# Altium PCB DriverV3.0.PcbDoc
Units mm, origin at the board's own origin, x right, y up, seen from the top; angles counter-clockwise.
Board outline 52 x 50 mm, 6 copper layers (Top, Signal1, Gnd1, Signal2, Gnd2, Bottom), stack 1.696 mm thick; 74 components, 33 nets, 311 pads, 891 vias.
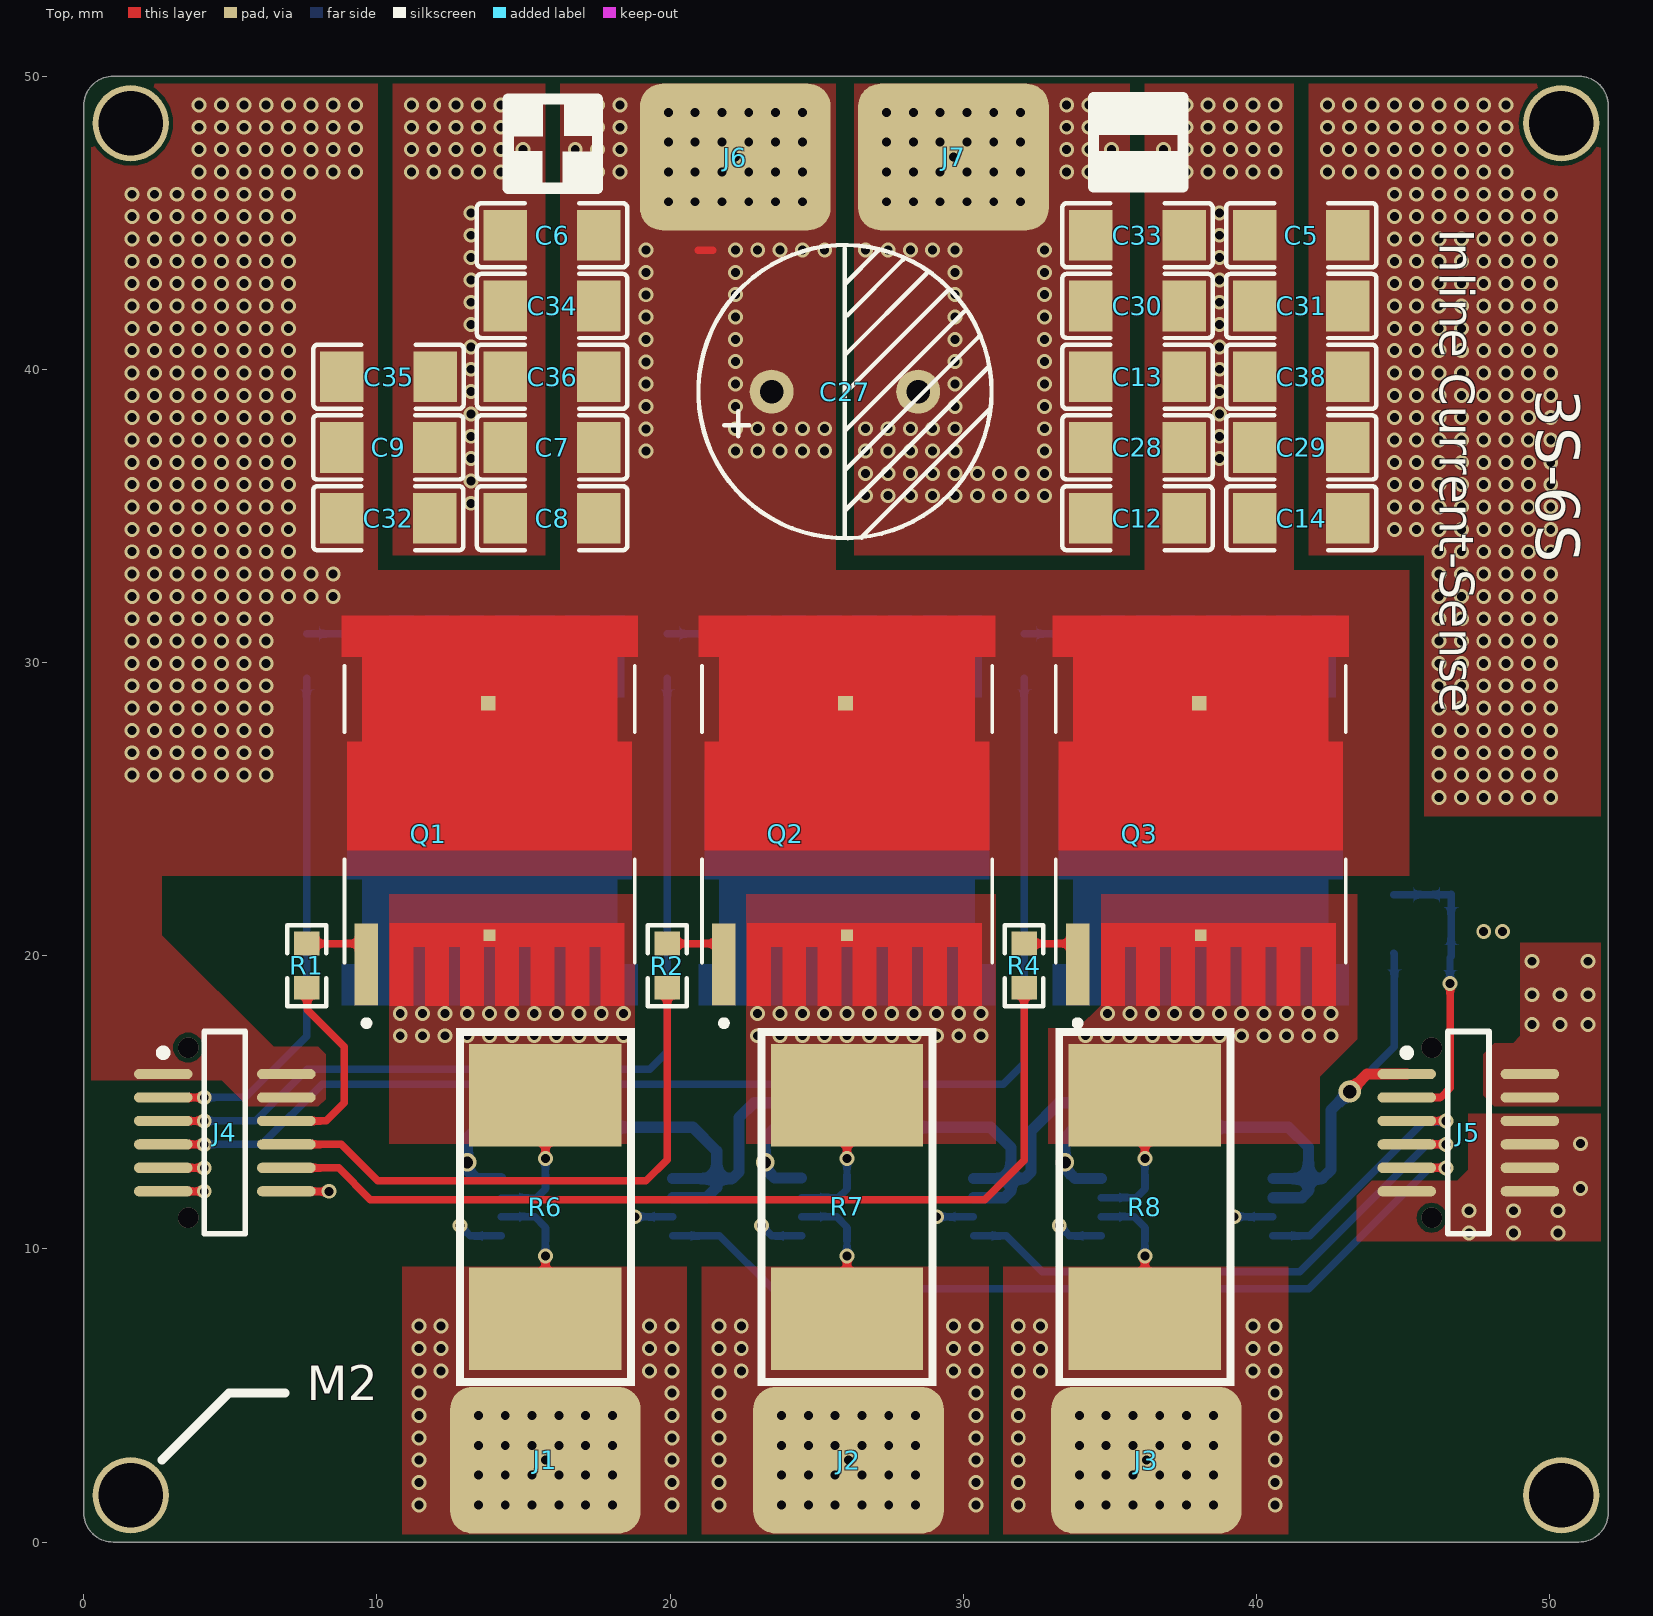
[diagram p0: Top view]
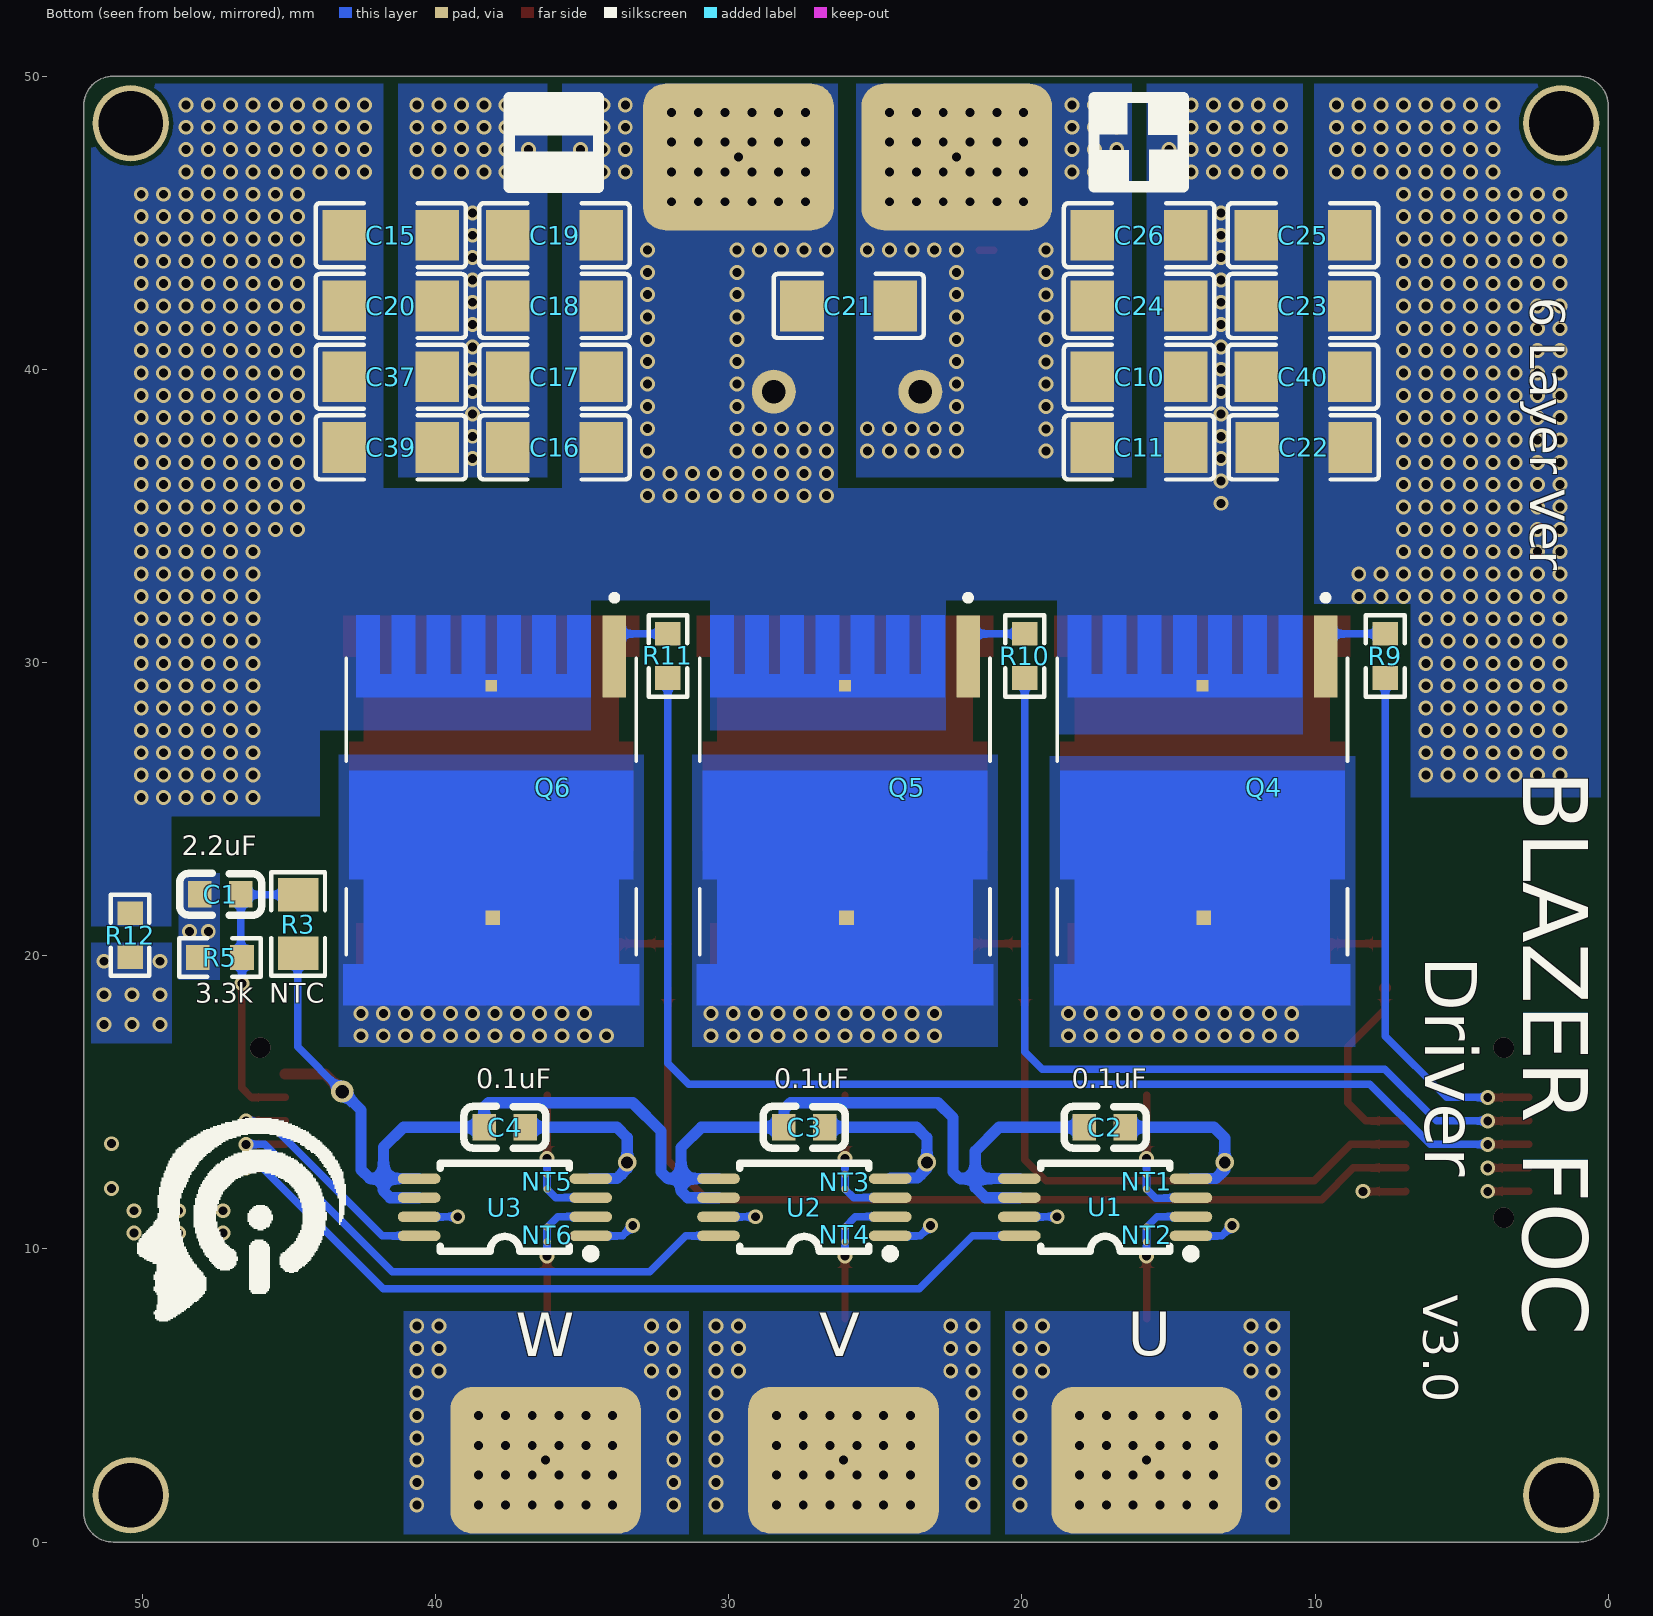
[diagram p1: Bottom view, seen from below]
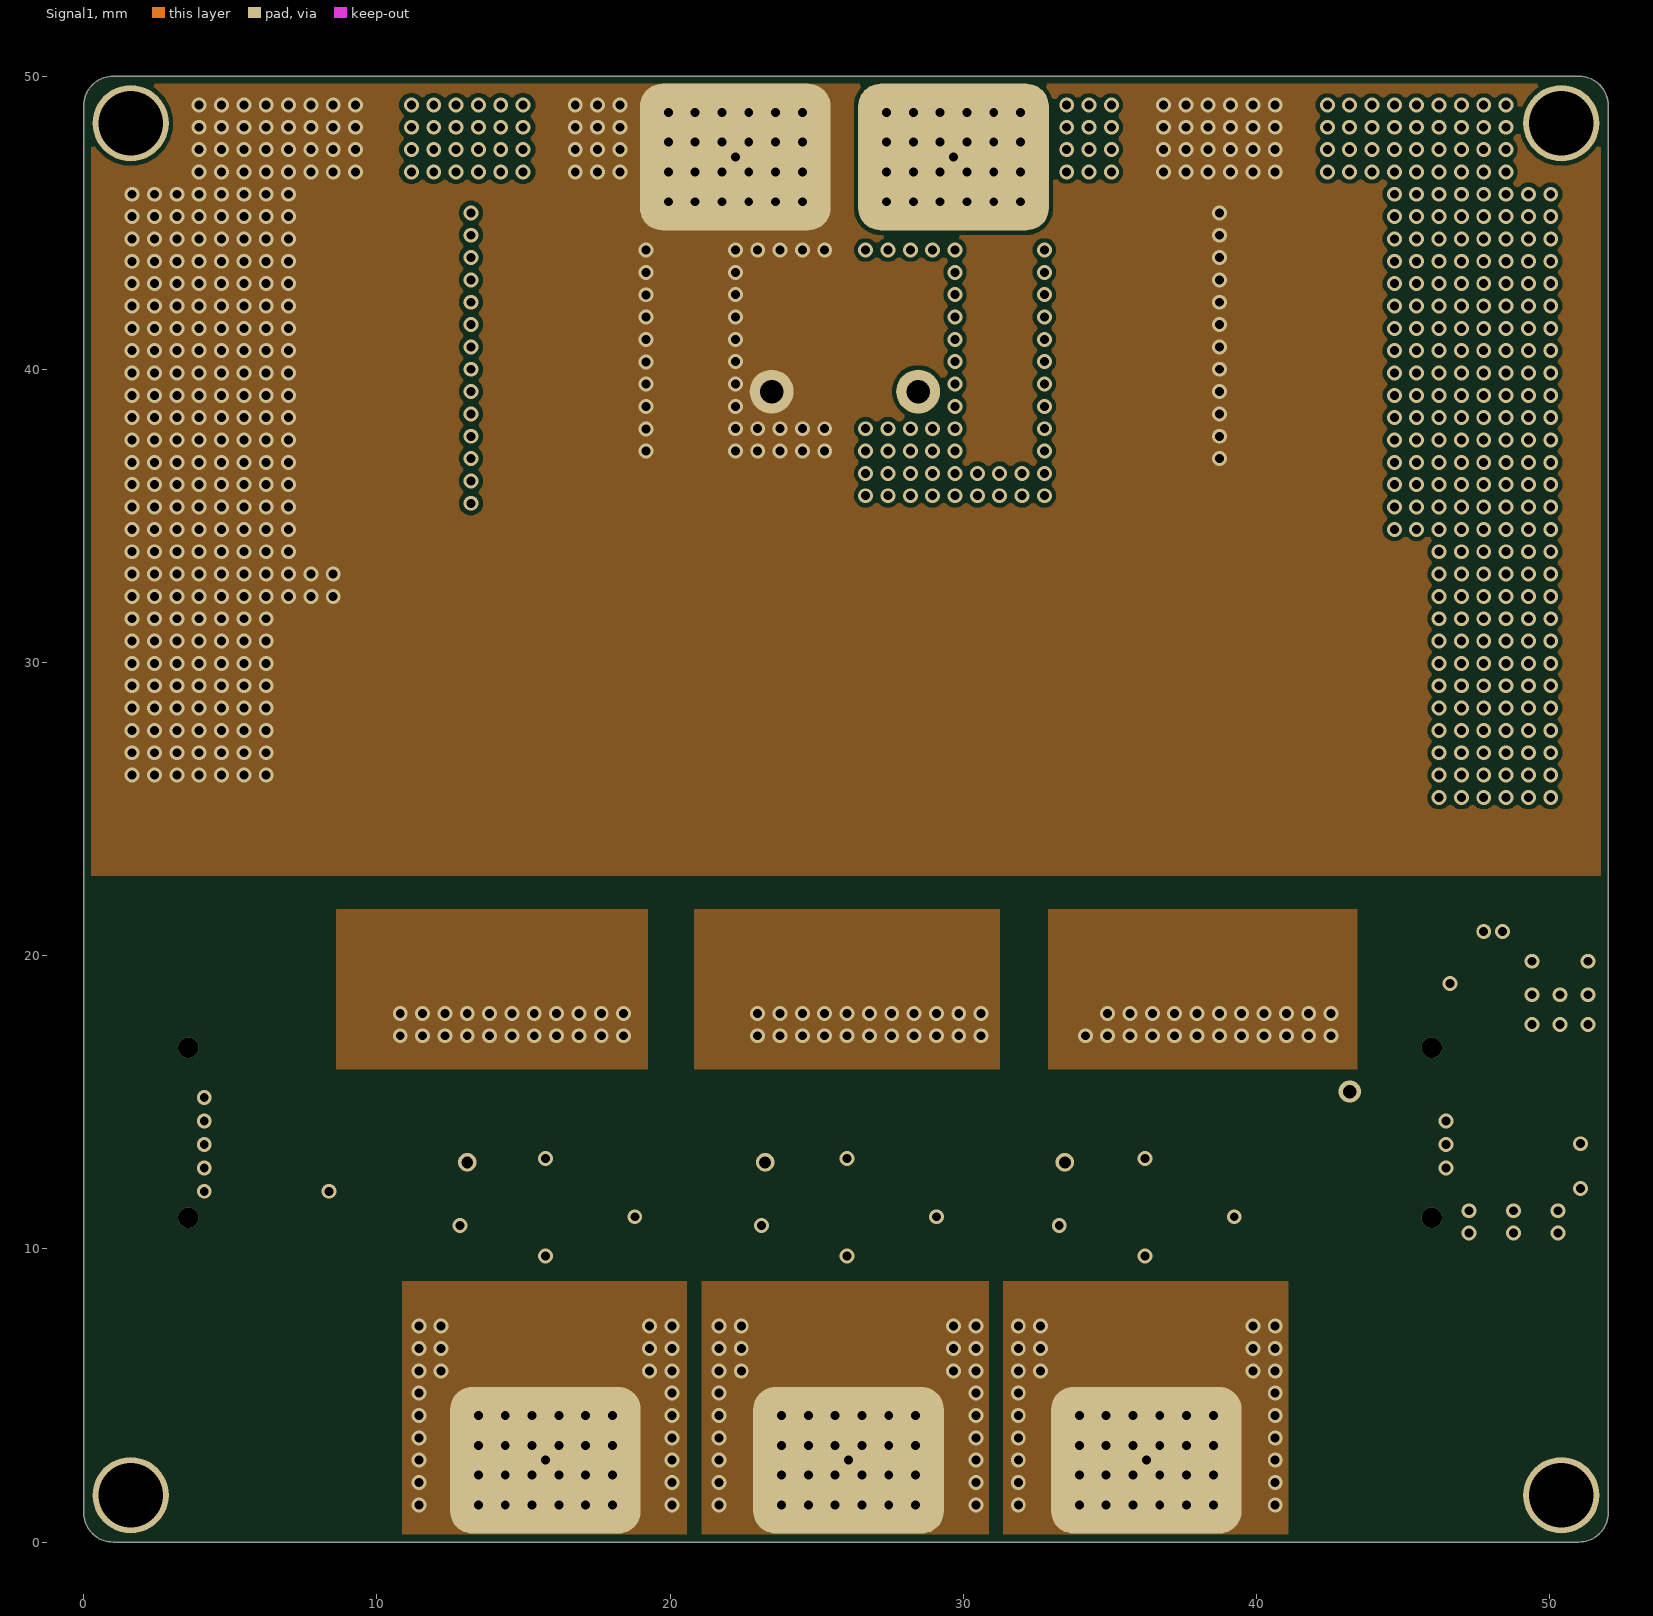
[diagram p2: Signal1]
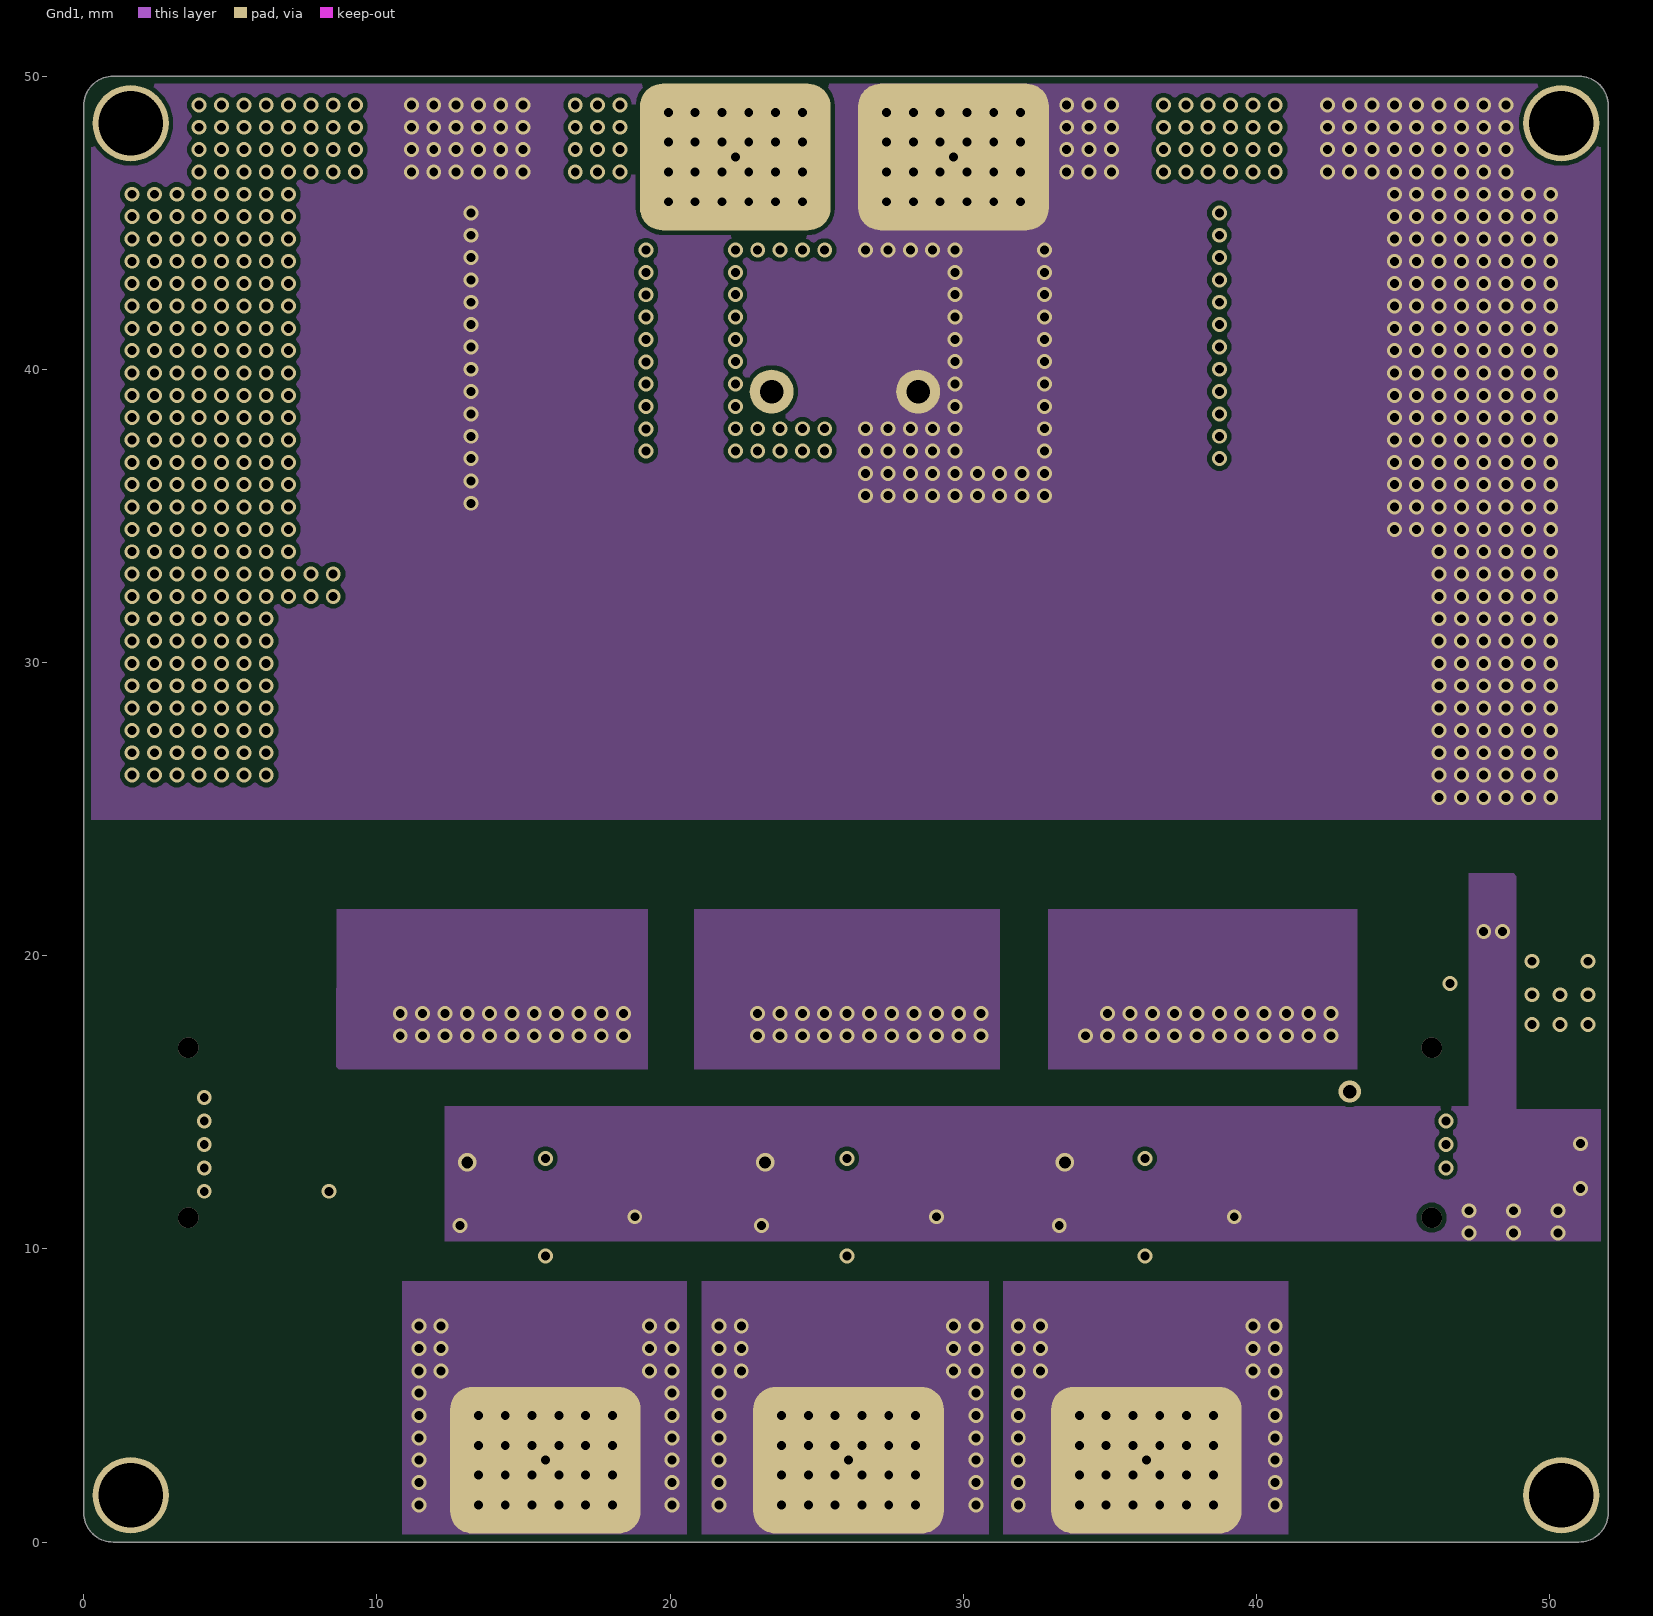
[diagram p3: Gnd1]
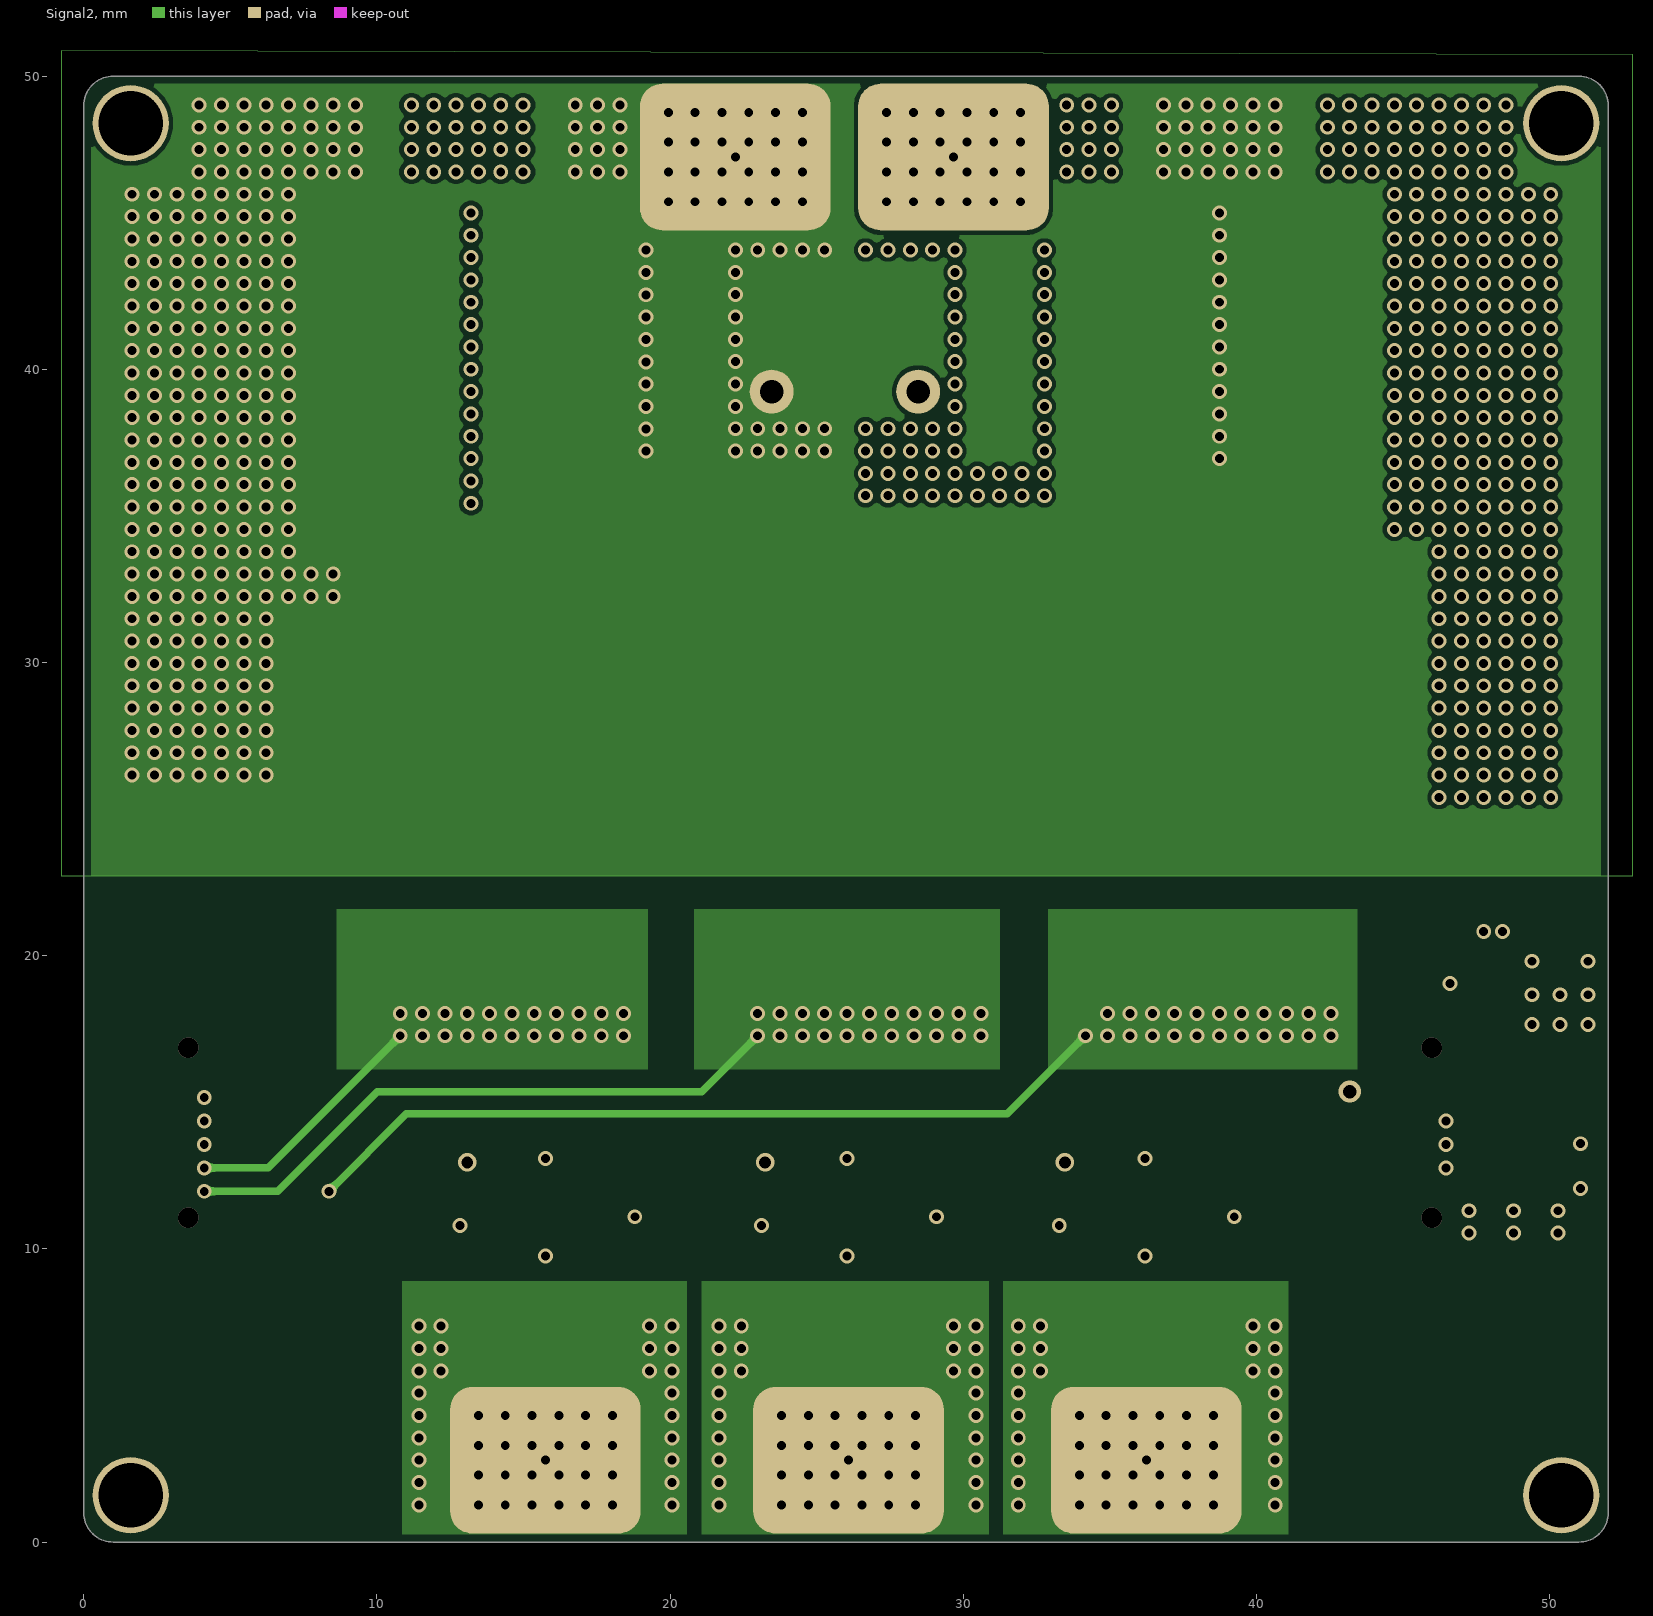
[diagram p4: Signal2]
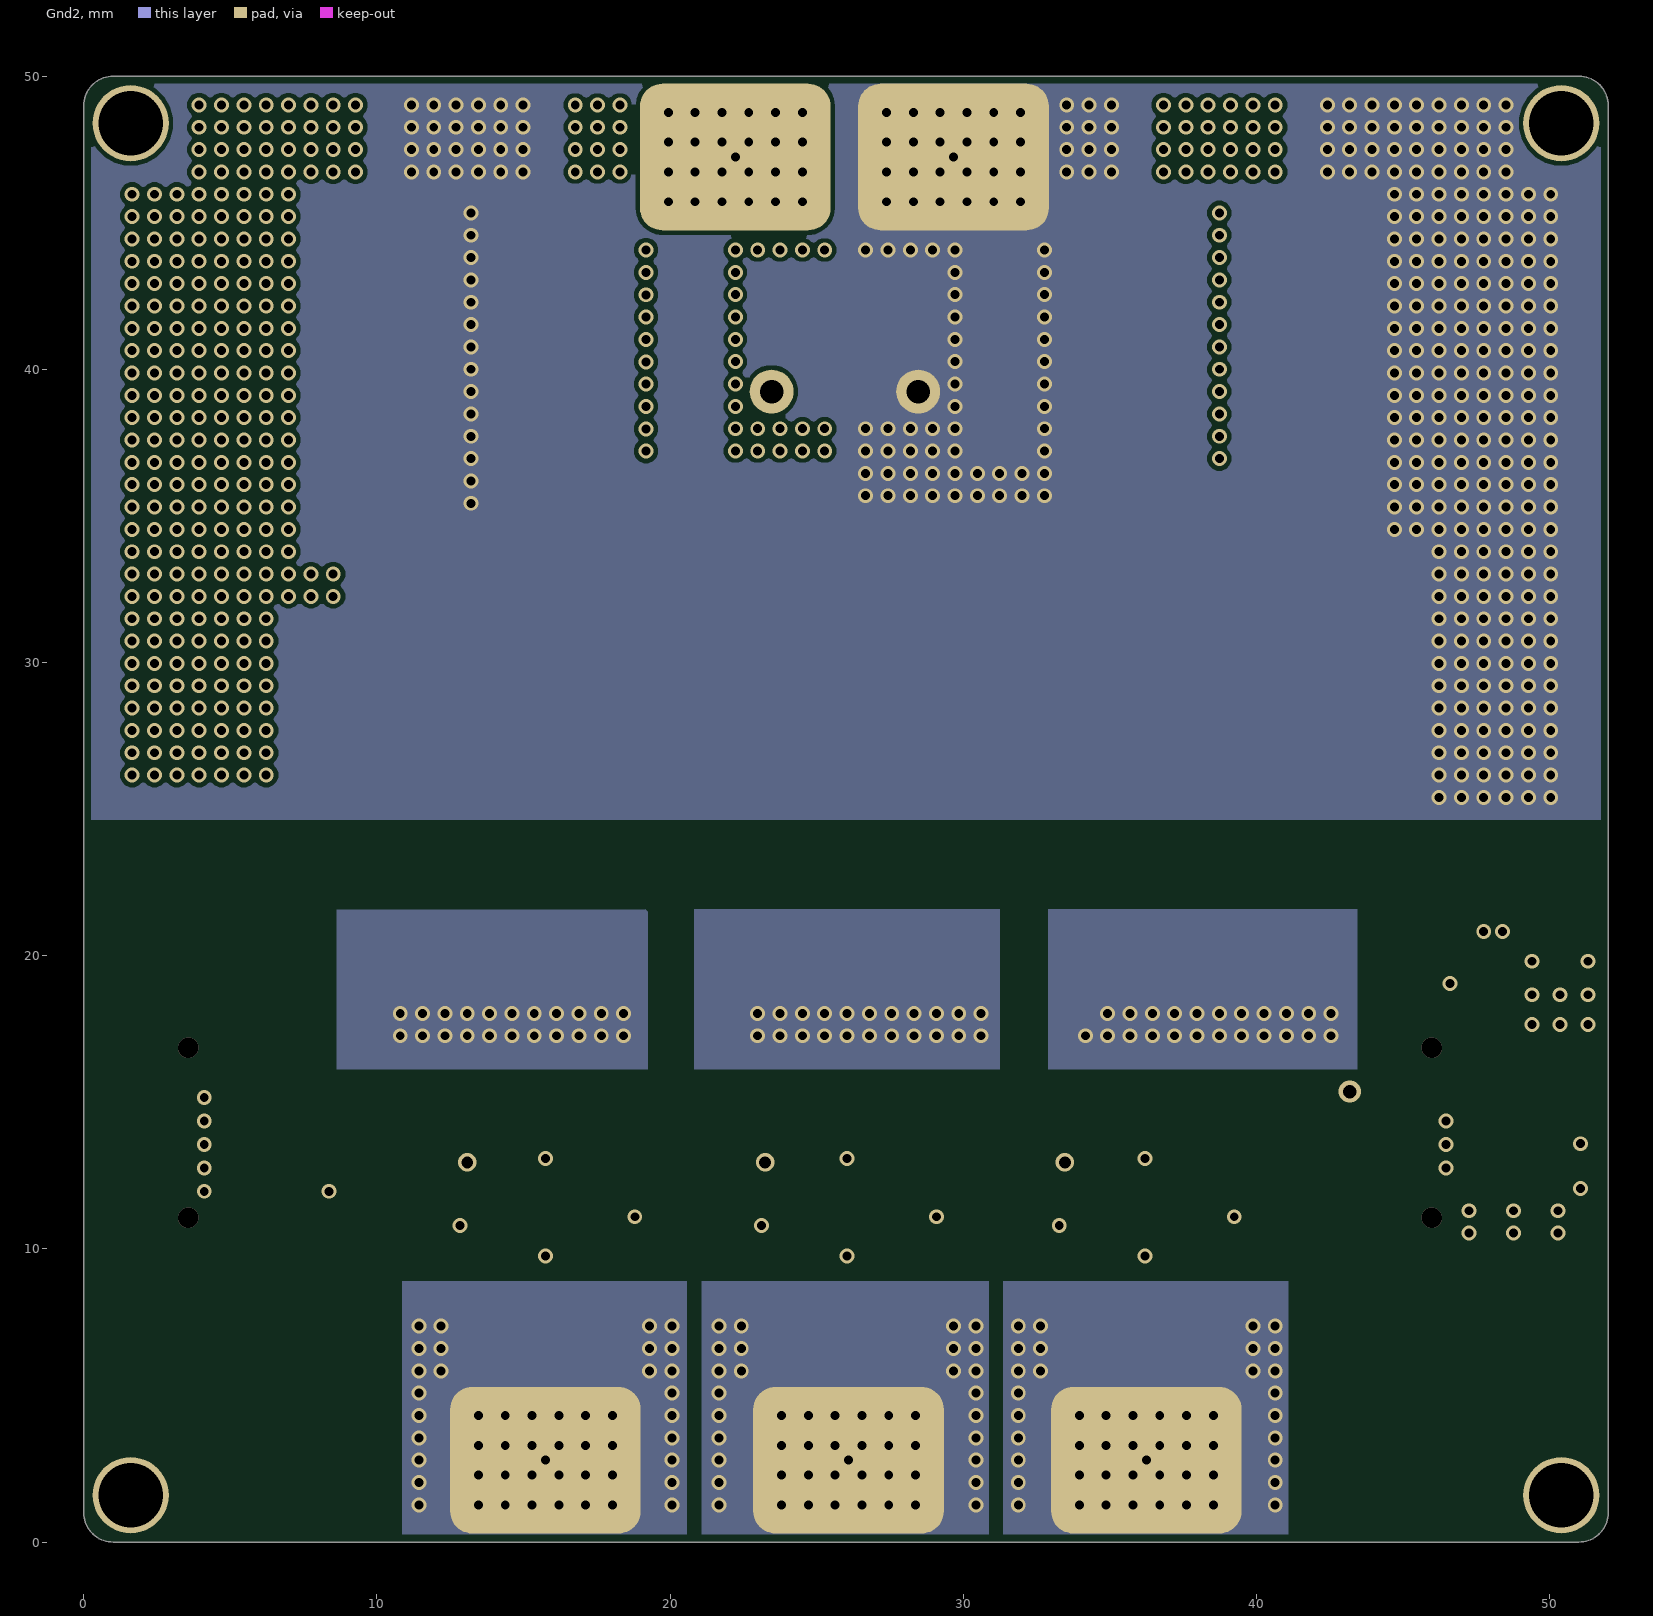
[diagram p5: Gnd2]
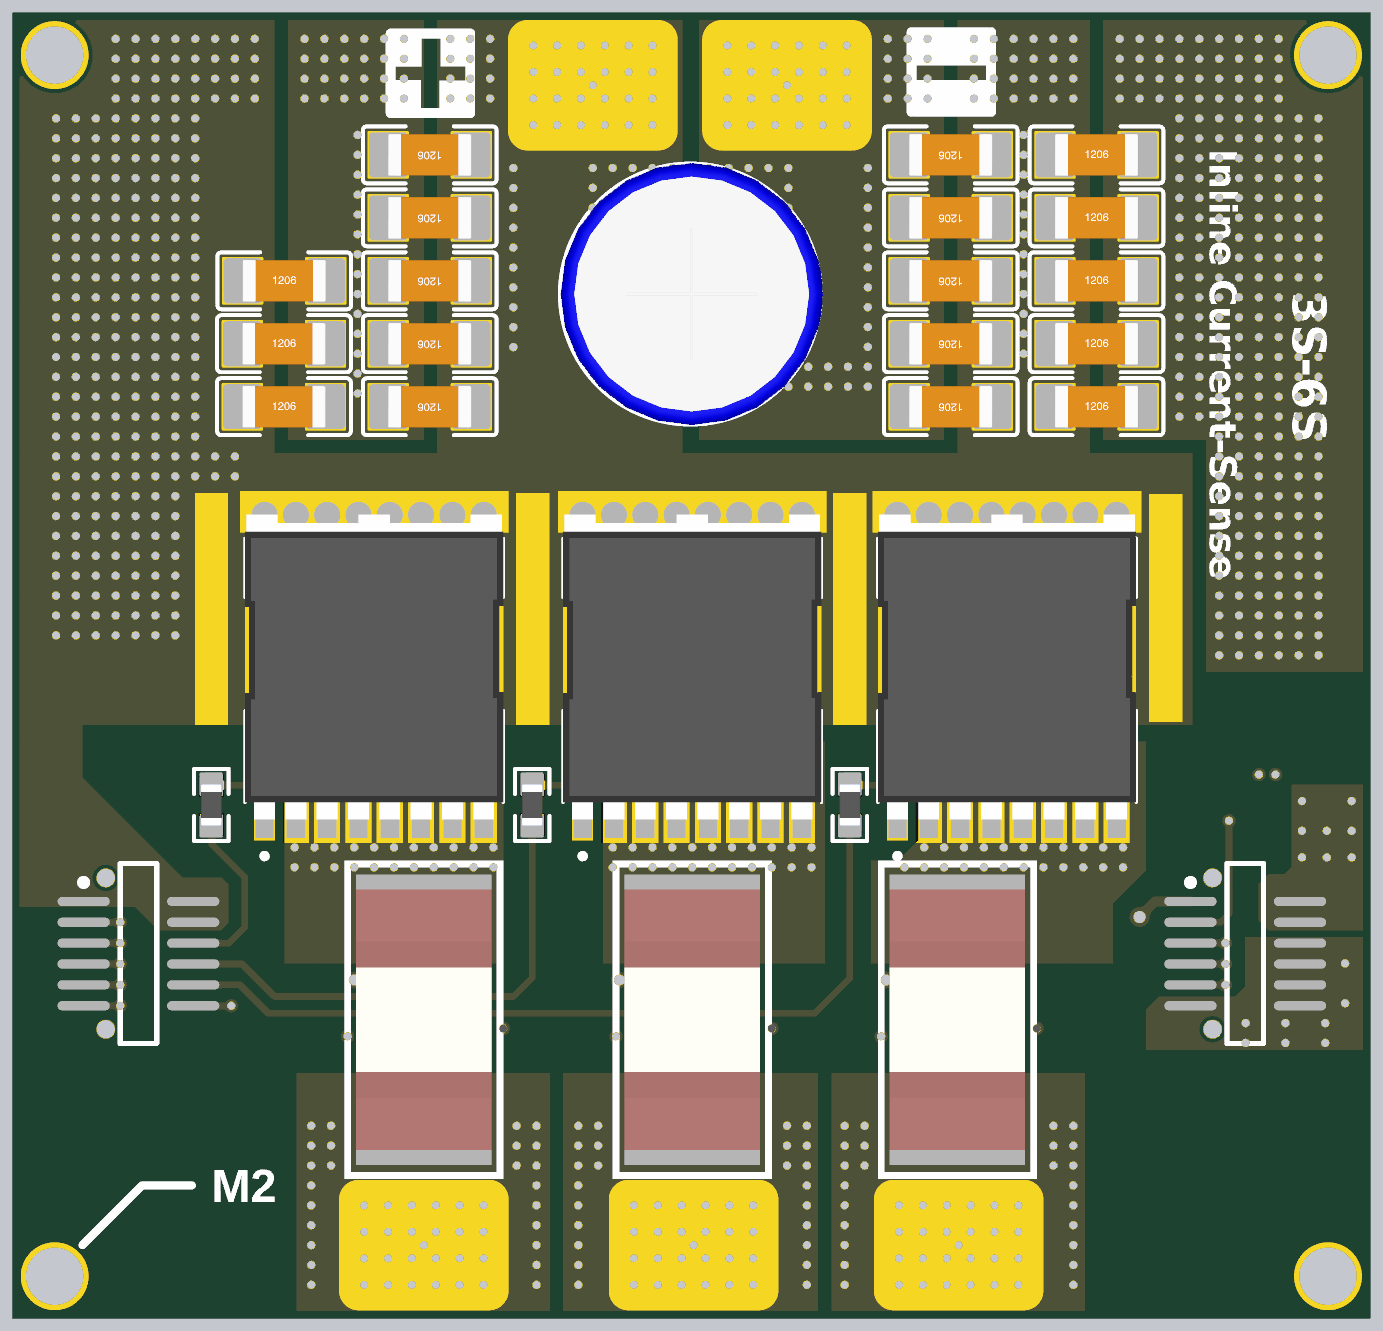
[diagram p6: 3D render of the assembled board from above, using the file's embedded part models]
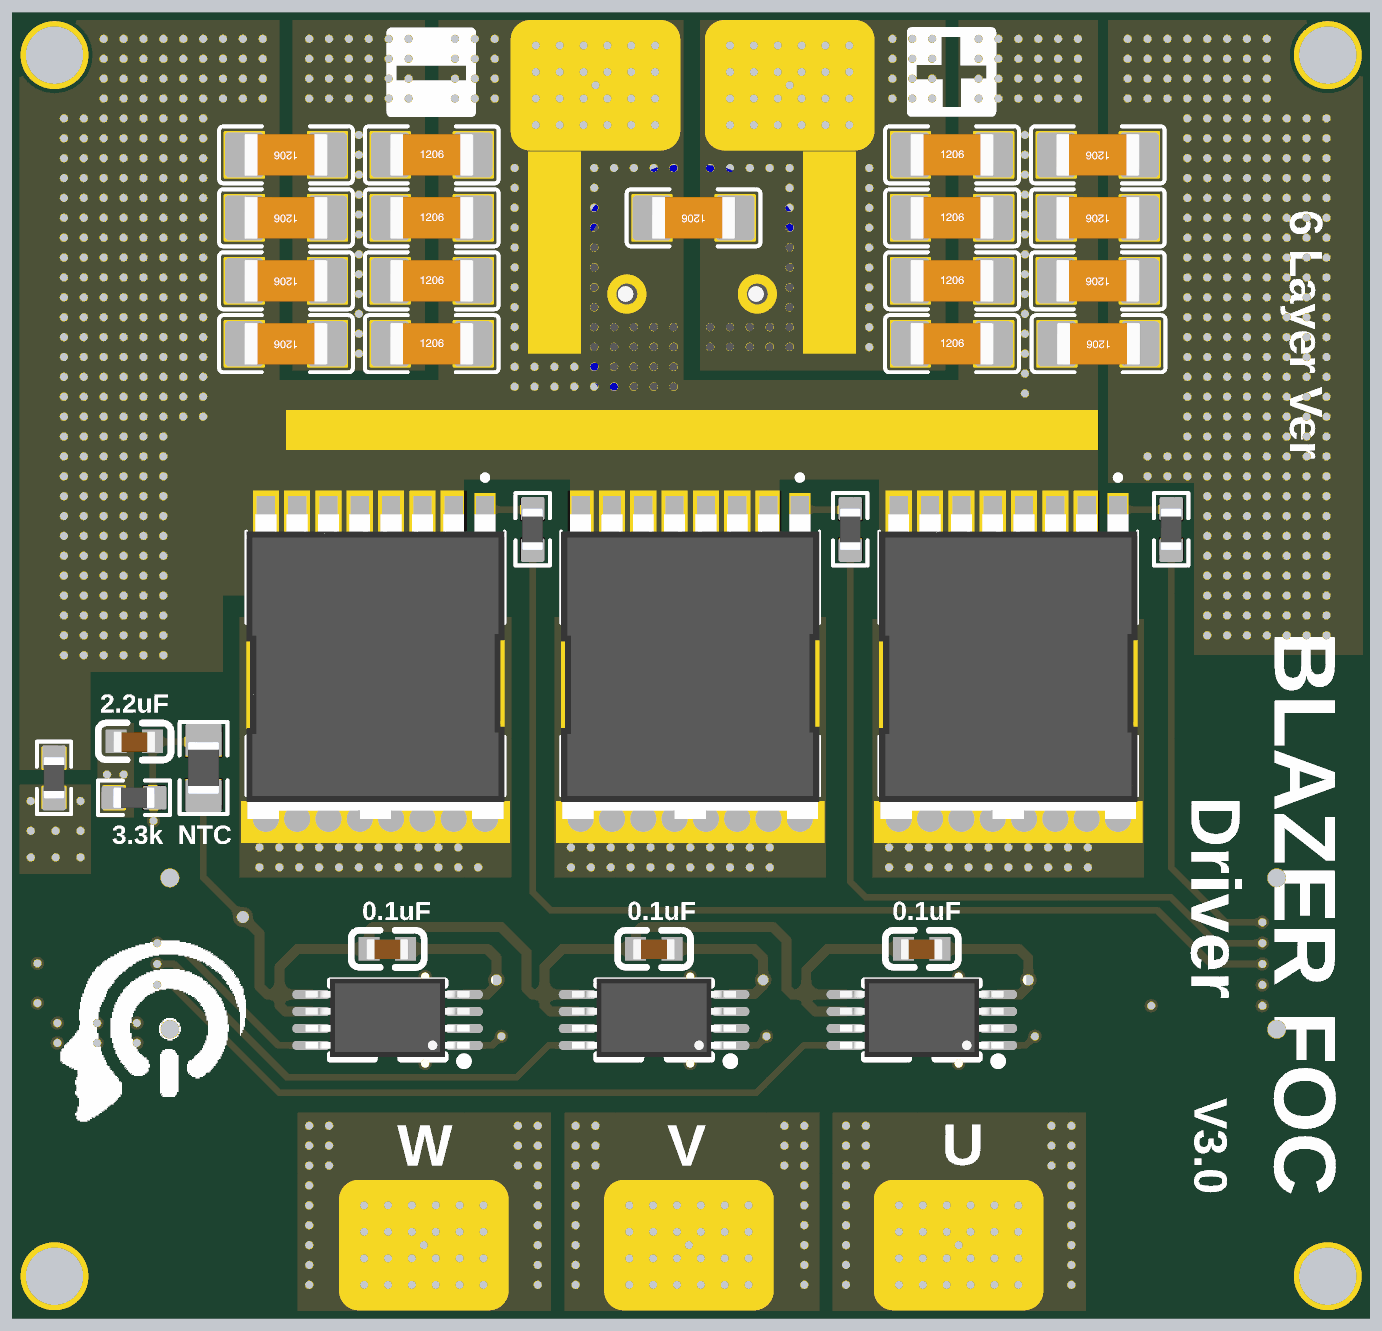
[diagram p7: 3D render of the assembled board from below, using the file's embedded part models]

## Layer stack, top to bottom
Top Solder: solder mask 0.0102, Solder Resist, Dk 3.5
Top: signal copper 0.0356
Dielectric 2: prepreg 0.0711, PP-006, Dk 4.1
Signal1: signal copper 0.035
Dielectric 4: prepreg 0.0711, PP-006, Dk 4.1
Gnd1: signal copper 0.035
Dielectric 1: dielectric 1.2, FR-4, Dk 4.8
Signal2: signal copper 0.035
Dielectric 5: prepreg 0.0711, PP-006, Dk 4.1
Gnd2: signal copper 0.035
Dielectric 3: prepreg 0.0711, PP-006, Dk 4.1
Bottom: signal copper 0.0356
Bottom Solder: solder mask 0.0102, Solder Resist, Dk 3.5

## Board outline
0,1 ccw(c1,1) 1,0 51,0 ccw(c51,1) 52,1 52,49 ccw(c51,49) 51,50 1,50 ccw(c1,49) 0,49

## Design rules (kind name [scope] priority, off if disabled: settings)
BoardOutlineClearance [All] p1: gap=0 ignorepadtopadclearanceinfootprint=FALSE except(0.254: Poly-OutlineEdge)
Clearance [All] p1: gap=0.152 ignorepadtopadclearanceinfootprint=FALSE except(0.102: Arc-Arc Arc-Track Track-Track)
ComponentClearance [All] p1: gap=0 collisioncheckmode=3 verticalgap=0 showdistances=FALSE
Height [All] p1: minheight=0 maxheight=50.8 prefheight=12.7
HoleSize [All] p1: absolutevalues=TRUE maxlimit=12.7 minlimit=0 maxpercent=80.000 minpercent=20.000
HoleToHoleClearance [All] p1: gap=0 allowstackedmicrovias=TRUE
MinimumSolderMaskSliver [All] p1: minsoldermaskwidth=0
PolygonConnect PolygonConnect_1 [All vs IsNamedPolygon('Bottom-PGND')] p1: connectstyle=Direct reliefconductorwidth=0.254 reliefentries=4 polygonreliefangle="90 Angle" airgapwidth=0.254
PolygonConnect PolygonConnect_PGND [InNet('PGND')] p2: connectstyle=Direct reliefconductorwidth=0.254 reliefentries=4 polygonreliefangle="90 Angle" airgapwidth=0.254
PolygonConnect [All] p3: connectstyle=Direct reliefconductorwidth=0.254 reliefentries=4 polygonreliefangle="90 Angle" airgapwidth=0.254
RoutingVias [All] p1: holewidth=0.305 width=0.61 viastyle="Through Hole" minholewidth=0.254 minwidth=0.254 maxholewidth=0.762 maxwidth=1.27
SilkToSilkClearance [All] p1: silktosilkclearance=0
SilkToSolderMaskClearance [IsPad] p1: minsilkscreentomaskgap=0 clearancetoexposedcopper=TRUE
SolderMaskExpansion [IsVia] p1: expansion=0.102 istentingtop=TRUE
Width [All] p1: maxlimit=2.54 minlimit=0.152 preferedwidth=0.254
23 further rules are at their usual default settings.

## Classes and differential pairs
component class DriverV3.0: C1 C2 C3 C4 C5 C6 C7 C8 C9 C10 C11 C12 C13 C14 C15 C17 C19 C21 C23 C25 C26 C27 C29 C30 C33 C35 C36 C37 J1 J2 J3 J4 J5 J6 J7 mxm NT1 NT2 NT3 NT4 NT5 NT6 Q1 Q2 Q3 Q4 Q5 Q6 R1 R2 R3 R4 R5 R6 R7 R8 R9 R10 R11 R12 U1 U2 U3

## Components (designator, comment, footprint, x,y, rotation, side; value= is the part's Value field where it differs from the comment)
C1 "2.2uf" 0603C 47.34,22.098 r0 bottom
C2 "0.1uf" 0603C 17.169,14.149 r0 bottom
C3 "0.1uf" 0603C 27.43,14.149 r0 bottom
C4 "0.1uf" 0603C 37.642,14.149 r0 bottom
C5 "10uf" 1206C 41.529,44.577 r0 top
C6 "10uf" 1206C 15.975,44.577 r180 top
C7 "10uf" 1206C 15.975,37.338 r180 top
C8 "10uf" 1206C 15.975,34.925 r180 top
C9 "10uf" 1206C 10.387,37.338 r0 top
C10 "10uf" 1206C 16.002,39.751 r180 bottom
C11 "10uf" 1206C 16.002,37.338 r180 bottom
C12 "10uf" 1206C 35.941,34.925 r180 top
C13 "10uf" 1206C 35.941,39.751 r180 top
C14 "10uf" 1206C 41.529,34.925 r0 top
C15 "10uf" 1206C 41.529,44.577 r0 bottom
C16 "10uf" 1206C 35.941,37.338 r180 bottom
C17 "10uf" 1206C 35.941,39.751 r180 bottom
C18 "10uf" 1206C 35.941,42.164 r180 bottom
C19 "10uf" 1206C 35.941,44.577 r180 bottom
C20 "10uf" 1206C 41.529,42.164 r0 bottom
C21 "10uf" 1206C 25.908,42.164 r0 bottom
C22 "10uf" 1206C 10.387,37.338 r0 bottom
C23 "10uf" 1206C 10.414,42.164 r0 bottom
C24 "10uf" 1206C 16.002,42.164 r180 bottom
C25 "10uf" 1206C 10.414,44.577 r0 bottom
C26 "10uf" 1206C 16.002,44.577 r180 bottom
C27 "220uf" ELECTRO10-5-N 23.464,39.243 r0 top
C28 "10uf" 1206C 35.941,37.338 r180 top
C29 "10uf" 1206C 41.529,37.338 r0 top
C30 "10uf" 1206C 35.941,42.164 r180 top
C31 "10uf" 1206C 41.529,42.164 r0 top
C32 "10uf" 1206C 10.387,34.925 r0 top
C33 "10uf" 1206C 35.941,44.577 r180 top
C34 "10uf" 1206C 15.975,42.164 r180 top
C35 "10uf" 1206C 10.397,39.751 r0 top
C36 "10uf" 1206C 15.975,39.751 r180 top
C37 "10uf" 1206C 41.529,39.751 r0 bottom
C38 "10uf" 1206C 41.529,39.751 r0 top
C39 "10uf" 1206C 41.529,37.338 r0 bottom
C40 "10uf" 1206C 10.414,39.751 r0 bottom
J1 "Pad" PAD_RECT 15.748,2.794 r0 top
J2 "Pad" PAD_RECT 26.086,2.794 r0 top
J3 "Pad" PAD_RECT 36.246,2.794 r0 top
J4 "BTB-2X6-M" BTB-M-0.8mm-2x6P 4.81,13.966 r0 top
J5 "BTB-2X6-M" BTB-M-0.8mm-2x6P 47.228,13.966 r0 top
J6 "Pad" PAD_RECT 22.225,47.244 r0 top
J7 "Pad" PAD_RECT 29.667,47.244 r0 top
NT1 "0.25mm" NetTie_0.25mm 15.748,12.542 r270 bottom net-tie
NT2 "0.25mm" NetTie_0.25mm 15.748,10.241 r90 bottom net-tie
NT3 "0.25mm" NetTie_0.25mm 26.035,12.542 r270 bottom net-tie
NT4 "0.25mm" NetTie_0.25mm 26.035,10.241 r90 bottom net-tie
NT5 "0.25mm" NetTie_0.25mm 36.195,12.542 r270 bottom net-tie
NT6 "0.25mm" NetTie_0.25mm 36.195,10.241 r90 bottom net-tie
Q1 "HYG006N04LS1TA" TOLL 13.843,24.951 r90 top
Q2 "HYG006N04LS1TA" TOLL 26.035,24.951 r90 top
Q3 "HYG006N04LS1TA" TOLL 38.1,24.951 r90 top
Q4 "HYG006N04LS1TA" TOLL 13.843,24.96 r270 bottom
Q5 "HYG006N04LS1TA" TOLL 26.035,24.96 r270 bottom
Q6 "HYG006N04LS1TA" TOLL 38.1,24.96 r270 bottom
R1 "2.2R" 0603R 7.604,19.662 r90 top
R2 "2.2R" 0603R 19.903,19.662 r90 top
R3 "NTC 10k" 0805R 44.688,21.082 r270 bottom
R4 "2.2R" 0603R 32.075,19.662 r90 top
R5 "3.3k" 0603R 47.355,19.939 r180 bottom
R6 "1mR" 3920R 15.748,11.43 r270 top value=1mΩ
R7 "1mR" 3920R 26.035,11.43 r270 top value=1mΩ
R8 "1mR" 3920R 36.195,11.43 r270 top value=1mΩ
R9 "2.2R" 0603R 7.604,30.226 r90 bottom
R10 "2.2R" 0603R 19.903,30.226 r90 bottom
R11 "2.2R" 0603R 32.075,30.226 r90 bottom
R12 "0R" 0603R 50.419,20.701 r270 bottom
U1 "INA240A1PWR" TSSOP-8 17.161,11.422 r90 bottom
U2 "INA240A1PWR" TSSOP-8 27.422,11.422 r90 bottom
U3 "INA240A1PWR" TSSOP-8 37.634,11.422 r90 bottom

## Footprints (in the part's own frame and the unit in brackets; to place one, negate y for a bottom-side part, rotate by r counter-clockwise, add the part's x,y. Pads: shape width x height; smd on the part's side, far side on the other; paste and mask are expansions set on the pad)
0603C [mm]
  rect 0.8x0.9 smd: 1(-0.7,0) 2(0.7,0)
  silkscreen extent -1.41,-0.71 1.39,0.72, body extent -0.8,-0.38 0.8,0.42, height 0.6
0603R [mm]
  rect 0.806x0.864 smd paste-100 mask+0.051: 1(-0.753,0) 2(0.753,0)
  silkscreen extent -1.39,-0.66 1.39,0.66, body extent -0.8,-0.4 0.8,0.4, height 0.38
0805R [mm]
  rect 1.133x1.377 smd paste-100 mask+0.051: 1(-1,0) 2(1,0)
  silkscreen extent -1.76,-0.92 1.76,0.92, body extent -1,-0.6 1,0.6, height 0.5
1206C [mm]
  rect 1.485x1.728 smd paste-100 mask+0.051: 1(-1.593,0) 2(1.593,0)
  silkscreen extent -2.56,-1.09 2.56,1.09, body extent -1.6,-0.81 1.6,0.81, height 1.21
3920R [mm]
  rect 3.5x5.2 smd: 1(-3.81,0) 2(3.81,0)
  silkscreen extent -6.1,-3.05 6.1,3.05, body extent -5,-2.6 5,2.6, height 1.05
BTB-M-0.8mm-2x6P [mm] "0.8间距2x6P公座，SMD"
  oval 2x0.35 smd: 1(-2.1,2) 2(-2.1,1.2) 3(-2.1,0.4) 4(-2.1,-0.4) 5(-2.1,-1.2) 6(-2.1,-2) 7(2.1,-2) 8(2.1,-1.2) 9(2.1,-0.4) 10(2.1,0.4) 11(2.1,1.2) 12(2.1,2)
  silkscreen extent -2.22,-3.45 0.7,3.45, body extent -1.1,-3.45 1.1,3.45, height 2
ELECTRO10-5-N [mm]
  round 1.5 hole 0.8: 1(0,0) 2(5,0)
  silkscreen extent -2.5,-5 7.5,5, body extent -2.48,-5.03 7.58,5.03, height 12.78
NetTie_0.25mm [mm] "Net tie, 0.25mm"
  round 0.25 smd paste-2: 1(0,0) 2(0.5,0)
  Top region: 0,0.125 0.5,0.125 0.5,-0.125 0,-0.125
PAD_RECT [mil]
  round 20 hole 12: 1(-90,-60) 1(-90,-20) 1(-90,20) 1(-90,60) 1(-54,-60) 1(-54,-20) 1(-54,20) 1(-54,60) 1(-18,-60) 1(-18,-20) 1(-18,20) 1(-18,60) 1(18,-60) 1(18,-20) 1(18,20) 1(18,60) 1(54,-60) 1(54,-20) 1(54,20) 1(54,60) 1(90,-60) 1(90,-20) 1(90,20) 1(90,60)
  rrect30% 255.91x196.85 hole 12: 1(0,0)
TOLL [mm]
  rect 2.8x0.8 smd paste-2: 1(-5.25,4.2)
  rect 0.4x0.4 smd paste-1 mask+0: 2(-4.25,0)
  rect 0.5x0.5 smd paste-1 mask+0: 3(3.665,0.05)
  Top region: 6.65,-5.05 5.25,-5.05 5.25,-4.35 2.35,-4.35 2.35,-4.85 -1.35,-4.85 -1.35,4.85 2.35,4.85 2.35,4.35 5.25,4.35 5.25,5.05 6.65,5.05
  Top region: -3.85,-4.6 -6.65,-4.6 -6.65,-3.8 -4.65,-3.8 -4.65,-3.4 -6.65,-3.4 -6.65,-2.6 -4.65,-2.6 -4.65,-2.2 -6.65,-2.2 -6.65,-1.4 -4.65,-1.4 -4.65,-1 -6.65,-1 -6.65,-0.2 -4.65,-0.2 -4.65,0.2 -6.65,0.2 -6.65,1 -4.65,1 -4.65,1.4 -6.65,1.4 -6.65,2.2 -4.65,2.2 -4.65,2.6 -6.65,2.6 -6.65,3.4 -3.85,3.4
  silkscreen extent -7.35,-4.95 4.93,4.95, body extent -5.84,-4.95 5.84,4.95, height 2.4
TSSOP-8 [mm]
  oval 0.353x1.454 smd: 1(-0.975,-2.927) 2(-0.325,-2.927) 3(0.325,-2.927) 4(0.975,-2.927) 5(0.975,2.927) 6(0.325,2.927) 7(-0.325,2.927) 8(-0.975,2.927)
  silkscreen extent -1.73,-3.08 1.5,2.2, body extent -1.42,-3.14 1.58,3.14, height 1.09

## Part data
C1 C2 C3 C4 C5 C6 C7 C8 C9 C10 C11 C12 C13 C14 C15 C16 C17 C18 C19 C20 C21 C22 C23 C24 C25 C26 C28 C29 C30 C31 C32 C33 C34 C35 C36 C37 C38 C39 C40: library part CAP, "贴片电容"
C27: library part CAP+, "极性电容"
J1 J2 J3 J6 J7: "焊盘"
J4 J5: "0.8间距2x6P公座"
NT1 NT2 NT3 NT4 NT5 NT6: library part NetTie_0.25mm
Q1 Q2 Q3 Q4 Q5 Q6: "N沟道增强型MOS 40V-600A", Continuous Drain Current (Id)=600A, Drain Source On Resistance (RDS(on)@Vgs,Id)=0.45mΩ@10V,80A, Drain Source Voltage (Vdss)=40V, Gate Threshold Voltage (Vgs(th)@Id)=1.8V@250uA, Input Capacitance (Ciss@Vds)=15.4nF@25V, JLCPCB Part Class=扩展库, LCSC Part Name="N沟道 40V 600A", Manufacturer=HUAYI(华羿微), Operating Temperature=-55℃~+175℃@(Tj), Power Dissipation (Pd)=428W, Reverse Transfer Capacitance (Crss@Vds)=115pF@25V, Add into BOM=yes, Convert to PCB=yes, Datasheet=https://atta.szlcsc.com/upload/public/pdf/source/20220321/91BDC8248F772C15069ACBA52C025F8E.pdf, Device=HYG006N04LS1TA, Manufacturer Part=HYG006N04LS1TA, Supplier=LCSC, Supplier Footprint=TOLL, Supplier Part=C2982928, Symbol=HYG006N04LS1TA, Total Gate Charge (Qg@Vgs)=230nC@10V, Type=N沟道
R1 R2 R4 R5 R9 R10 R11 R12: library part RES, "贴片电阻"
R3: library part RT, "热敏电阻"
R6 R7 R8: library part HoLRS3920, "采样电阻", JLCPCB Part Class=扩展库, LCSC Part Name="1mΩ ±1% 8W", Manufacturer=RESI(开步睿思）, Manufacturer Part=SEWF3920F1L00P9, Power(Watts)=8W, Temperature Coefficient=±25ppm/℃, Tolerance=±1%, Add into BOM=yes, Convert to PCB=yes, Datasheet=https://atta.szlcsc.com/upload/public/pdf/source/20231123/B35E1474215435358D1EA89A1F2CD565.pdf, Device=SEWF3920F1L00P9, Mounting Sytle=贴片, Supplier=LCSC, Supplier Footprint=3920, Supplier Part=C5224161, Symbol=SEWF3920F1L00P9, Type=采样电阻
U1 U2 U3: JLCPCB Part Class=扩展库, Manufacturer=TI(德州仪器), Operating Temperature=-40℃~+125℃, Supply Current=1.8mA, Add into BOM=yes, Convert to PCB=yes, Datasheet=https://www.ti.com/cn/lit/gpn/ina240, Device=INA240A1PWR, LCSC Part Name=INA240A1PWR, Manufacturer Part=INA240A1PWR, Name=INA240A1PWR, Number of Channels=1, Supplier=LCSC, Supplier Footprint=TSSOP-8, Supplier Part=C93965, Symbol=INA240A1PWR

## Free pads (board coordinates)
  round 2.6 hole 2.2: 8(1.6,1.6) 8(1.6,48.4) 8(50.4,1.6) 8(50.4,48.4)

## Via types
v1: diameter 0.508, hole 0.305, Top to Bottom, tented both sides, 883 vias
v2: diameter 0.7, hole 0.7, Top to Bottom, tented both sides, 4 vias
v3: diameter 0.635, hole 0.406, Top to Bottom, tented both sides, 3 vias
v4: diameter 0.762, hole 0.457, Top to Bottom, tented both sides, 1 vias

## Nets (pads, with @x,y where several pads share a name; then routed paths per layer and width w, separated by ;. In a path a pad name is that pad's centre, name@x,y a point inside that pad or via, vN(x,y) a via of type N, cw(c..) or ccw(c..) an arc to the next point about the centre after c; other vN are vias at no path point)
A_N: NT1.2 U1.3 | length 1.6
  Bottom w0.254: U1.3@14.234,11.734 15.44,11.734 NT1.2
A_P: NT2.2 U1.2 | length 1.7
  Bottom w0.254: U1.2 15.392,11.097 NT2.2
AGND: C1.2 C2.1 C3.1 C4.1 J5.6 J5.7 J5.8 J5.9 J5.10 R5.1 U1.1 U1.4 U1.7 U2.1 U2.4 U2.7 U3.1 U3.4 U3.7 | length 26.6
  Bottom w0.254: v1(12.827,10.795) 13.175,10.447 U1.1 ; v1(18.796,11.097) U1.7 ; v1(23.114,10.795) 23.462,10.447 U2.1 ; U2.4@24.476,12.416 U2.4 ; v1(29.083,11.097) U2.7 ; v1(33.274,10.795) 33.622,10.447 U3.1 ; v1(39.243,11.097) U3.7
  Bottom w0.381: U1.4 13.384,12.397 13.081,12.7 v3(13.081,12.954) 13.081,13.783 13.447,14.149 C2.1 ; U2.4@24.476,12.416 23.566,12.416 23.241,12.741 23.241,13.79 23.601,14.149 C3.1 ; U3.4 33.808,12.397 33.463,12.742 33.463,13.8 33.812,14.149 C4.1
  other v1: 47.244,10.541 48.768,10.541 50.292,10.541 47.244,11.303 48.768,11.303 50.292,11.303 51.054,12.065 51.054,13.589 47.752,20.828 48.387,20.828
  other v3: 23.241,12.954 33.463,12.954
AVCC: C2.2 C3.2 C4.2 J5.1 R3.2 U1.5 U1.6 U2.5 U2.6 U3.5 U3.6 | length 54.2
  Top w0.381: v4(43.18,15.367) 43.779,15.966 J5.1
  Bottom w0.254: v4(43.18,15.367) 44.704,16.891 44.704,20.066 R3.2
  Bottom w0.381: C2.2 20.776,14.149 21.59,13.335 21.59,12.397 ; U1.6 21.24,11.747 21.59,12.097 21.59,12.397 ; U1.5 21.59,12.397 ; U2.6 31.4,11.747 31.623,11.97 31.623,12.397 ; U2.5 31.623,12.397 ; U3.6 41.551,11.747 41.774,11.97 41.774,12.397 ; U3.5 41.774,12.397 ; v4(43.18,15.367) 42.545,14.732 42.545,12.7 42.242,12.397 41.774,12.397 ; 21.59,12.397 22.129,12.397 22.352,12.62 22.352,14.478 22.86,14.986 27.887,14.986 28.11,14.763 28.11,14.169 C3.2 30.936,14.149 31.623,13.462 31.623,12.397 ; 31.623,12.397 32.082,12.397 32.312,12.627 32.312,14.024 33.274,14.986 38.196,14.986 38.342,14.84 C4.2 41.096,14.149 41.774,13.471 41.774,12.397
B_N: NT3.2 U2.3 | length 1.7
  Bottom w0.254: U2.3 25.74,11.747 NT3.2
B_P: NT4.2 U2.2 | length 1.7
  Bottom w0.254: U2.2 25.679,11.097 NT4.2
C_N: NT5.2 U3.3 | length 1.6
  Bottom w0.254: U3.3 35.9,11.747 NT5.2
C_P: NT6.2 U3.2 | length 1.6
  Bottom w0.254: U3.2 35.839,11.097 NT6.2
DCBUS: C5.1 C6.1 C7.1 C8.1 C9.1 C10.1 C11.1 C12.1 C13.1 C14.1 C15.1 C16.1 C17.1 C18.1 C19.1 C20.1 C21.1 C22.1 C23.1 C24.1 C25.1 C26.1 C27.1 C28.1 C29.1 C30.1 C31.1 C32.1 C33.1 C34.1 C35.1 C36.1 C37.1 C38.1 C39.1 C40.1 J4.1 J4.11 J4.12 J6.1 Q1.3 Q2.3 Q3.3 | length 0.5
  Top w0.254: 20.955,44.069 20.957,44.071 21.462,44.071 21.464,44.074
  other v1: 1.651,26.162 2.413,26.162 3.175,26.162 3.937,26.162 4.699,26.162 5.461,26.162 6.223,26.162 1.651,26.924 2.413,26.924 3.175,26.924 3.937,26.924 4.699,26.924 5.461,26.924 6.223,26.924 1.651,27.686 2.413,27.686 3.175,27.686 3.937,27.686 4.699,27.686 5.461,27.686 6.223,27.686 1.651,28.448 2.413,28.448 3.175,28.448 3.937,28.448 4.699,28.448 5.461,28.448 6.223,28.448 1.651,29.21 2.413,29.21 3.175,29.21 3.937,29.21 4.699,29.21 5.461,29.21 6.223,29.21 1.651,29.972 2.413,29.972 3.175,29.972 3.937,29.972 4.699,29.972 5.461,29.972 6.223,29.972 1.651,30.734 2.413,30.734 3.175,30.734 3.937,30.734 4.699,30.734 5.461,30.734 6.223,30.734 1.651,31.496 2.413,31.496 3.175,31.496 3.937,31.496 4.699,31.496 5.461,31.496 6.223,31.496 1.651,32.258 2.413,32.258 3.175,32.258 3.937,32.258 4.699,32.258 5.461,32.258 6.223,32.258 6.985,32.258 7.747,32.258 8.509,32.258 1.651,33.02 2.413,33.02 3.175,33.02 3.937,33.02 4.699,33.02 5.461,33.02 6.223,33.02 6.985,33.02 7.747,33.02 8.509,33.02 1.651,33.782 2.413,33.782 3.175,33.782 3.937,33.782 4.699,33.782 5.461,33.782 6.223,33.782 6.985,33.782 1.651,34.544 2.413,34.544 2.413,34.544 3.175,34.544 3.175,34.544 3.937,34.544 3.937,34.544 4.699,34.544 4.699,34.544 5.461,34.544 5.461,34.544 6.223,34.544 6.223,34.544 6.985,34.544 1.651,35.306 2.413,35.306 3.175,35.306 3.937,35.306 4.699,35.306 5.461,35.306 6.223,35.306 6.985,35.306 1.651,36.068 2.413,36.068 3.175,36.068 3.937,36.068 4.699,36.068 5.461,36.068 6.223,36.068 6.985,36.068 1.651,36.83 2.413,36.83 3.175,36.83 3.937,36.83 4.699,36.83 5.461,36.83 6.223,36.83 6.985,36.83 38.735,36.957 19.177,37.211 22.226,37.216 22.988,37.216 23.75,37.216 24.512,37.216 25.274,37.216 1.651,37.592 2.413,37.592 3.175,37.592 3.937,37.592 4.699,37.592 5.461,37.592 6.223,37.592 6.985,37.592 38.735,37.719 19.177,37.973 22.226,37.978 22.988,37.978 23.75,37.978 24.512,37.978 25.274,37.978 1.651,38.354 2.413,38.354 3.175,38.354 3.937,38.354 4.699,38.354 5.461,38.354 6.223,38.354 6.985,38.354 38.735,38.481 19.177,38.735 22.226,38.74 1.651,39.116 2.413,39.116 3.175,39.116 3.937,39.116 4.699,39.116 5.461,39.116 6.223,39.116 6.985,39.116 38.735,39.243 19.177,39.497 22.226,39.502 1.651,39.878 2.413,39.878 3.175,39.878 3.937,39.878 4.699,39.878 5.461,39.878 6.223,39.878 6.985,39.878 38.735,40.005 19.177,40.259 22.226,40.264 1.651,40.64 2.413,40.64 3.175,40.64 3.937,40.64 4.699,40.64 5.461,40.64 6.223,40.64 6.985,40.64 38.735,40.767 19.177,41.021 22.226,41.026 1.651,41.402 2.413,41.402 3.175,41.402 3.937,41.402 4.699,41.402 5.461,41.402 6.223,41.402 6.985,41.402 38.735,41.529 19.177,41.783 22.226,41.788 1.651,42.164 2.413,42.164 3.175,42.164 3.937,42.164 4.699,42.164 5.461,42.164 6.223,42.164 6.985,42.164 38.735,42.291 19.177,42.545 22.226,42.55 1.651,42.926 2.413,42.926 3.175,42.926 3.937,42.926 4.699,42.926 5.461,42.926 6.223,42.926 6.985,42.926 38.735,43.053 19.177,43.307 22.226,43.312 1.651,43.688 2.413,43.688 3.175,43.688 3.937,43.688 4.699,43.688 5.461,43.688 6.223,43.688 6.985,43.688 38.735,43.815 19.178,44.074 22.226,44.074 22.988,44.074 23.75,44.074 24.512,44.074 25.274,44.074 1.651,44.45 2.413,44.45 3.175,44.45 3.937,44.45 4.699,44.45 5.461,44.45 6.223,44.45 6.985,44.45 38.735,44.577 1.651,45.212 2.413,45.212 3.175,45.212 3.937,45.212 4.699,45.212 5.461,45.212 6.223,45.212 6.985,45.212 38.735,45.339 38.735,45.339 1.651,45.974 2.413,45.974 3.175,45.974 3.937,45.974 4.699,45.974 5.461,45.974 6.223,45.974 6.985,45.974 3.937,46.736 4.699,46.736 5.461,46.736 6.223,46.736 6.985,46.736 7.747,46.736 8.509,46.736 9.271,46.736 16.764,46.736 17.526,46.736 18.288,46.736 36.83,46.736 37.592,46.736 38.354,46.736 39.116,46.736 39.878,46.736 40.64,46.736 3.937,47.498 4.699,47.498 5.461,47.498 6.223,47.498 6.985,47.498 7.747,47.498 8.509,47.498 9.271,47.498 16.764,47.498 17.526,47.498 18.288,47.498 36.83,47.498 37.592,47.498 38.354,47.498 39.116,47.498 39.878,47.498 40.64,47.498 3.937,48.26 4.699,48.26 5.461,48.26 6.223,48.26 6.985,48.26 7.747,48.26 8.509,48.26 9.271,48.26 16.764,48.26 17.526,48.26 18.288,48.26 36.83,48.26 37.592,48.26 38.354,48.26 39.116,48.26 39.878,48.26 40.64,48.26 3.937,49.022 4.699,49.022 5.461,49.022 6.223,49.022 6.985,49.022 7.747,49.022 8.509,49.022 9.271,49.022 16.764,49.022 17.526,49.022 18.288,49.022 36.83,49.022 37.592,49.022 38.354,49.022 39.116,49.022 39.878,49.022 40.64,49.022
GH_A: J4.10 R1.1 | length 6.7
  Top w0.254: J4.10 8.27,14.366 8.89,14.986 8.89,16.891 7.624,18.157 R1.1@7.624,18.889
  Top w0.381: R1.1 R1.1@7.624,18.889
GH_B: J4.9 R2.1 | length 19.7
  Top w0.254: J4.9 8.786,13.566 10.033,12.319 19.177,12.319 19.903,13.045 R2.1
GH_C: J4.8 R4.1 | length 32.1
  Top w0.254: J4.8 8.697,12.766 9.779,11.684 30.734,11.684 32.075,13.025 R4.1
GL_A: J4.2 R9.1 | length 18
  Top w0.254: J4.2 v1(4.11,15.166) v1@4.138,15.166
  Bottom w0.254: v1(4.11,15.166) 5.514,15.166 7.604,17.256 R9.1
GL_B: J4.3 R10.1 | length 31
  Top w0.254: J4.3 v1(4.11,14.366) v1@4.176,14.366
  Bottom w0.254: v1(4.11,14.366) 5.857,14.366 7.62,16.129 19.304,16.129 19.903,16.728 R10.1
GL_C: J4.4 R11.1 | length 43.7
  Top w0.254: J4.4 v1(4.11,13.566)
  Bottom w0.254: v1(4.11,13.566) 6.073,13.566 8.128,15.621 31.369,15.621 32.075,16.327 R11.1
GND: J5.11 J5.12 R12.2
  other v1: 49.403,17.653 50.355,17.653 51.308,17.653 49.403,18.669 50.355,18.669 51.308,18.669 49.403,19.812 51.308,19.812
NetQ1_1: Q1.1 R1.2 | length 2.6
  Top w0.254: R1.2 Q1.1@9.433,20.416
  Top w0.381: Q1.1@9.433,20.416 9.643,20.206 Q1.1
NetQ2_1: Q2.1 R2.2 | length 2.5
  Top w0.254: R2.2 Q2.1@21.625,20.416
  Top w0.381: Q2.1@21.625,20.416 21.835,20.206 Q2.1
NetQ3_1: Q3.1 R4.2 | length 2.4
  Top w0.254: R4.2 Q3.1@33.69,20.416
  Top w0.381: Q3.1@33.69,20.416 33.9,20.206 Q3.1
NetQ4_1: Q4.1 R9.2 | length 2.6
  Bottom w0.254: R9.2 9.37,30.979 9.643,30.706 Q4.1
NetQ5_1: Q5.1 R10.2 | length 2.5
  Bottom w0.254: R10.2 21.562,30.979 21.835,30.706 Q5.1
NetQ6_1: Q6.1 R11.2 | length 2.4
  Bottom w0.254: R11.2 33.627,30.979 33.9,30.706 Q6.1
PGND: C5.2 C6.2 C7.2 C8.2 C9.2 C10.2 C11.2 C12.2 C13.2 C14.2 C15.2 C16.2 C17.2 C18.2 C19.2 C20.2 C21.2 C22.2 C23.2 C24.2 C25.2 C26.2 C27.2 C28.2 C29.2 C30.2 C31.2 C32.2 C33.2 C34.2 C35.2 C36.2 C37.2 C38.2 C39.2 C40.2 J7.1 Q4.2 Q5.2 Q6.2 R12.1
  other v1: 46.228,25.4 46.99,25.4 47.752,25.4 48.514,25.4 49.276,25.4 50.038,25.4 46.228,26.162 46.99,26.162 47.752,26.162 48.514,26.162 49.276,26.162 50.038,26.162 46.228,26.924 46.99,26.924 47.752,26.924 48.514,26.924 49.276,26.924 50.038,26.924 46.228,27.686 46.99,27.686 47.752,27.686 48.514,27.686 49.276,27.686 50.038,27.686 46.228,28.448 46.99,28.448 47.752,28.448 48.514,28.448 49.276,28.448 50.038,28.448 46.228,29.21 46.99,29.21 47.752,29.21 48.514,29.21 49.276,29.21 50.038,29.21 46.228,29.972 46.99,29.972 47.752,29.972 48.514,29.972 49.276,29.972 50.038,29.972 46.228,30.734 46.99,30.734 47.752,30.734 48.514,30.734 49.276,30.734 50.038,30.734 46.228,31.496 46.99,31.496 47.752,31.496 48.514,31.496 49.276,31.496 50.038,31.496 46.228,32.258 46.99,32.258 47.752,32.258 48.514,32.258 49.276,32.258 50.038,32.258 46.228,33.02 46.99,33.02 47.752,33.02 48.514,33.02 49.276,33.02 50.038,33.02 46.228,33.782 46.99,33.782 47.752,33.782 48.514,33.782 49.276,33.782 50.038,33.782 44.704,34.544 45.466,34.544 46.228,34.544 46.99,34.544 47.752,34.544 48.514,34.544 48.514,34.544 49.276,34.544 50.038,34.544 44.704,35.306 45.466,35.306 46.228,35.306 46.99,35.306 47.752,35.306 48.514,35.306 48.514,35.306 49.276,35.306 50.038,35.306 13.208,35.433 26.67,35.692 27.432,35.692 28.194,35.692 28.956,35.692 29.718,35.692 29.718,35.692 30.48,35.692 31.242,35.692 32.004,35.692 32.766,35.692 44.704,36.068 45.466,36.068 46.228,36.068 46.99,36.068 47.752,36.068 48.514,36.068 48.514,36.068 49.276,36.068 50.038,36.068 13.208,36.195 26.67,36.454 27.432,36.454 28.194,36.454 28.956,36.454 29.718,36.454 29.718,36.454 30.48,36.454 31.242,36.454 32.004,36.454 32.766,36.454 44.704,36.83 45.466,36.83 46.228,36.83 46.99,36.83 47.752,36.83 48.514,36.83 48.514,36.83 49.276,36.83 50.038,36.83 13.208,36.957 26.67,37.216 27.432,37.216 28.194,37.216 28.956,37.216 29.718,37.216 29.718,37.216 32.766,37.216 44.704,37.592 45.466,37.592 46.228,37.592 46.99,37.592 47.752,37.592 48.514,37.592 48.514,37.592 49.276,37.592 50.038,37.592 13.208,37.719 26.67,37.978 26.67,37.978 27.432,37.978 28.194,37.978 28.956,37.978 29.718,37.978 29.718,37.978 32.766,37.978 44.704,38.354 45.466,38.354 46.228,38.354 46.99,38.354 47.752,38.354 48.514,38.354 48.514,38.354 49.276,38.354 50.038,38.354 13.208,38.481 29.718,38.74 32.766,38.74 44.704,39.116 45.466,39.116 46.228,39.116 46.99,39.116 47.752,39.116 48.514,39.116 48.514,39.116 49.276,39.116 50.038,39.116 13.208,39.243 13.208,39.243 29.718,39.502 32.766,39.502 44.704,39.878 45.466,39.878 46.228,39.878 46.99,39.878 47.752,39.878 48.514,39.878 48.514,39.878 49.276,39.878 50.038,39.878 13.208,40.005 29.718,40.264 32.766,40.264 44.704,40.64 45.466,40.64 46.228,40.64 46.99,40.64 47.752,40.64 48.514,40.64 48.514,40.64 49.276,40.64 50.038,40.64 13.208,40.767 29.718,41.026 32.766,41.026 44.704,41.402 45.466,41.402 46.228,41.402 46.99,41.402 47.752,41.402 48.514,41.402 48.514,41.402 49.276,41.402 50.038,41.402 13.208,41.529 29.718,41.788 32.766,41.788 44.704,42.164 45.466,42.164 46.228,42.164 46.99,42.164 47.752,42.164 48.514,42.164 48.514,42.164 49.276,42.164 50.038,42.164 13.208,42.291 29.718,42.55 32.766,42.55 44.704,42.926 45.466,42.926 46.228,42.926 46.99,42.926 47.752,42.926 48.514,42.926 48.514,42.926 49.276,42.926 50.038,42.926 13.208,43.053 29.718,43.312 32.766,43.312 44.704,43.688 45.466,43.688 46.228,43.688 46.99,43.688 47.752,43.688 48.514,43.688 48.514,43.688 49.276,43.688 50.038,43.688 13.208,43.815 26.67,44.074 26.67,44.074 27.432,44.074 28.194,44.074 28.956,44.074 29.718,44.074 32.766,44.074 44.704,44.45 45.466,44.45 46.228,44.45 46.99,44.45 47.752,44.45 48.514,44.45 48.514,44.45 49.276,44.45 50.038,44.45 13.208,44.577 44.704,45.212 45.466,45.212 46.228,45.212 46.99,45.212 47.752,45.212 48.514,45.212 48.514,45.212 49.276,45.212 50.038,45.212 13.208,45.339 44.704,45.974 45.466,45.974 46.228,45.974 46.99,45.974 47.752,45.974 48.514,45.974 48.514,45.974 49.276,45.974 50.038,45.974 11.176,46.736 11.938,46.736 12.7,46.736 13.462,46.736 14.224,46.736 14.986,46.736 33.528,46.736 34.29,46.736 35.052,46.736 42.418,46.736 43.18,46.736 43.942,46.736 44.704,46.736 44.704,46.736 45.466,46.736 45.466,46.736 46.228,46.736 46.228,46.736 46.99,46.736 46.99,46.736 47.752,46.736 47.752,46.736 48.514,46.736 48.514,46.736 11.176,47.498 11.938,47.498 12.7,47.498 13.462,47.498 14.224,47.498 14.986,47.498 33.528,47.498 34.29,47.498 35.052,47.498 42.418,47.498 43.18,47.498 43.942,47.498 44.704,47.498 45.466,47.498 46.228,47.498 46.99,47.498 47.752,47.498 48.514,47.498 11.176,48.26 11.938,48.26 12.7,48.26 13.462,48.26 14.224,48.26 14.986,48.26 33.528,48.26 34.29,48.26 35.052,48.26 42.418,48.26 43.18,48.26 43.942,48.26 44.704,48.26 45.466,48.26 46.228,48.26 46.99,48.26 47.752,48.26 48.514,48.26 11.176,49.022 11.938,49.022 12.7,49.022 13.462,49.022 14.224,49.022 14.986,49.022 33.528,49.022 34.29,49.022 35.052,49.022 42.418,49.022 42.418,49.022 43.18,49.022 43.942,49.022 44.704,49.022 45.466,49.022 46.228,49.022 46.99,49.022 47.752,49.022 48.514,49.022
SH_A: J4.5 NT1.1 Q1.2 Q4.3 R6.1 | length 12.6
  Top w0.254: J4.5 v1(4.11,12.766) ; v1(15.748,13.081) R6.1
  Signal2 w0.254: v1(4.11,12.766) 6.289,12.766 v1(10.795,17.272)
  Bottom w0.254: NT1.1 v1(15.748,13.081)
  other v1: 11.557,17.272 12.319,17.272 13.081,17.272 13.843,17.272 14.605,17.272 15.367,17.272 16.129,17.272 16.891,17.272 17.653,17.272 18.415,17.272 10.795,18.034 11.557,18.034 12.319,18.034 13.081,18.034 13.843,18.034 14.605,18.034 15.367,18.034 16.129,18.034 16.891,18.034 17.653,18.034 18.415,18.034
SH_B: J4.6 NT3.1 Q2.2 Q5.3 R7.1 | length 25.2
  Top w0.254: J4.6 v1(4.11,11.966) ; v1(26.035,13.081) R7.1
  Signal2 w0.254: v1(4.11,11.966) 6.61,11.966 10.011,15.367 21.082,15.367 v1(22.987,17.272)
  Bottom w0.254: NT3.1 v1(26.035,13.081)
  other v1: 23.749,17.272 24.511,17.272 25.273,17.272 26.035,17.272 26.797,17.272 27.559,17.272 28.321,17.272 29.083,17.272 29.845,17.272 30.607,17.272 22.987,18.034 23.749,18.034 24.511,18.034 25.273,18.034 26.035,18.034 26.797,18.034 27.559,18.034 28.321,18.034 29.083,18.034 29.845,18.034 30.607,18.034
SH_C: J4.7 NT5.1 Q3.2 Q6.3 R8.1 | length 32.2
  Top w0.254: J4.7 6.924,11.952 v1@8.368,11.952 ; v1(36.195,13.081) R8.1
  Signal2 w0.254: v1(8.368,11.966) 11.007,14.605 31.496,14.605 v1(34.163,17.272)
  Bottom w0.254: NT5.1 v1(36.195,13.081)
  other v1: 34.925,17.272 35.687,17.272 36.449,17.272 37.211,17.272 37.973,17.272 38.735,17.272 39.497,17.272 40.259,17.272 41.021,17.272 41.783,17.272 42.545,17.272 34.925,18.034 35.687,18.034 36.449,18.034 37.211,18.034 37.973,18.034 38.735,18.034 39.497,18.034 40.259,18.034 41.021,18.034 41.783,18.034 42.545,18.034
SO_A: J5.5 U1.8 | length 30.2
  Top w0.254: J5.5 v1(46.467,12.766)
  Bottom w0.254: U1.8 21.684,10.447 23.495,8.636 41.783,8.636 45.913,12.766 v1(46.467,12.766)
SO_B: J5.4 U2.8 | length 19.8
  Top w0.254: J5.4 v1(46.467,13.566)
  Bottom w0.254: U2.8 31.463,10.447 32.69,9.22 41.478,9.22 45.824,13.566 v1(46.467,13.566)
SO_C: J5.3 U3.8 | length 8.9
  Top w0.254: J5.3@45.12,14.359 J5.3 v1(46.467,14.366)
  Bottom w0.254: U3.8 41.816,10.447 45.705,14.336 46.437,14.336 v1(46.467,14.366)
TEMP_S: C1.1 J5.2 R3.1 R5.2 | length 10.2
  Top w0.254: J5.2 46.281,15.166 46.607,15.492 46.607,19.052 v1(46.605,19.054)
  Bottom w0.254: R3.1 46.623,22.082 C1.1 46.639,19.977 R5.2 46.602,19.057 v1@46.609,19.05
U: J1.1 NT2.1 R6.2 | length 2.6
  Top w0.254: R6.2 v1(15.748,9.754)
  Bottom w0.254: v1(15.748,9.754) NT2.1
  other v1: 11.43,1.27 20.066,1.27 11.43,2.032 20.066,2.032 11.43,2.794 20.066,2.794 11.43,3.556 20.066,3.556 11.43,4.318 20.066,4.318 11.43,5.08 20.066,5.08 11.43,5.842 12.192,5.842 19.304,5.842 20.066,5.842 11.43,6.604 12.192,6.604 19.304,6.604 20.066,6.604 11.43,7.366 12.192,7.366 19.304,7.366 20.066,7.366
V: J2.1 NT4.1 R7.2 | length 2.6
  Top w0.254: R7.2 v1(26.035,9.754)
  Bottom w0.254: v1(26.035,9.754) NT4.1
  other v1: 21.666,1.27 30.429,1.27 21.666,2.032 30.429,2.032 21.666,2.794 30.429,2.794 21.666,3.556 30.429,3.556 21.666,4.318 30.429,4.318 21.666,5.08 30.429,5.08 21.666,5.842 22.428,5.842 29.667,5.842 30.429,5.842 30.429,5.842 21.666,6.604 22.428,6.604 29.667,6.604 30.429,6.604 30.429,6.604 21.666,7.366 22.428,7.366 29.667,7.366 30.429,7.366 30.429,7.366
W: J3.1 NT6.1 R8.2 | length 2.6
  Top w0.254: R8.2 v1(36.195,9.754)
  Bottom w0.254: v1(36.195,9.754) NT6.1
  other v1: 31.877,1.27 40.64,1.27 40.64,1.27 31.877,2.032 40.64,2.032 31.877,2.794 40.64,2.794 31.877,3.556 40.64,3.556 31.877,4.318 40.64,4.318 31.877,5.08 40.64,5.08 31.877,5.842 31.877,5.842 32.639,5.842 39.878,5.842 40.64,5.842 31.877,6.604 31.877,6.604 32.639,6.604 39.878,6.604 40.64,6.604 31.877,7.366 31.877,7.366 32.639,7.366 39.878,7.366 40.64,7.366
copper on no net:
  other v2: 3.56,11.066 45.978,11.066 3.56,16.866 45.978,16.866

## Polygon pours and split planes (outlines as drawn)
DCBUS on Top "Top-DCBUS" (solid, remove dead copper, pour order 146): 0,15.748 4.699,15.748 5.588,14.859 8.001,14.859 8.255,15.113 8.255,16.637 8.001,16.891 6.477,16.891 2.667,20.701 2.667,22.733 45.212,22.733 45.212,33.147 41.275,33.147 41.275,50 36.195,50 36.195,33.147 25.654,33.147 25.654,50.038 16.256,50.038 16.256,33.147 10.033,33.147 10.033,50.038 0,50.038 0,22.733
PGND on Top "Top-PGND" (solid, remove dead copper, pour order 132): 45.72,24.765 52.07,24.765 52.07,50.038 41.783,50.038 41.783,33.655 45.72,33.655
W on Top "W_L01_P128" (solid, remove dead copper, pour order 128): 31.369,9.398 41.084,9.398 41.084,0.127 31.369,0.127
V on Top "V_L01_P127" (solid, remove dead copper, pour order 127): 21.082,9.398 30.861,9.398 30.861,0.127 21.082,0.127
U on Top "U_L01_P124" (solid, remove dead copper, pour order 124): 10.858,9.398 20.574,9.398 20.574,0.127 10.858,0.127
SH_C on Top "SH_C_L01_P120" (solid, remove dead copper, pour order 120): 34.671,22.098 34.7,22.069 34.7,18.301 34.684,18.301 33.909,17.526 32.893,17.526 32.893,13.589 42.164,13.589 42.164,15.875 43.434,17.145 43.434,22.098
SH_B on Top "SH_B_L01_P119" (solid, remove dead copper, pour order 119): 22.606,22.098 22.606,13.589 31.115,13.589 31.115,22.098
SH_A on Top "SH_A_L01_P118" (solid, remove dead copper, pour order 118): 10.414,22.098 10.414,13.589 18.796,13.589 18.796,22.098
PGND on Top "PGND_L01_P094" (solid, remove dead copper, pour order 94): 15.748,50 15.748,33.655 10.541,33.655 10.541,50
PGND on Top "PGND_L01_P093" (solid, remove dead copper, pour order 93): 26.289,50.038 26.289,33.655 35.687,33.655 35.687,50.038
GND on Top "GND_L01_P087" (solid, remove dead copper, pour order 87): 49.006,20.447 52,20.447 52,14.859 48.117,14.859 47.736,15.24 47.736,16.637 48.117,17.018 48.752,17.018 49.006,17.272
AGND on Top "Top-AGND" (solid, remove dead copper, pour order 91): 52,10.266 52,14.605 47.228,14.605 47.228,12.7 46.847,12.319 43.926,12.319 43.418,11.811 43.418,10.287 43.439,10.266
W on Bottom "W_L06_P155" (solid, remove dead copper, pour order 155): 31.369,7.874 31.369,0.127 41.084,0.127 41.084,7.874
V on Bottom "V_L06_P154" (solid, remove dead copper, pour order 154): 21.082,7.874 21.082,0.127 30.861,0.127 30.861,7.874
U on Bottom "U_L06_P153" (solid, remove dead copper, pour order 153): 10.858,7.874 10.858,0.127 20.574,0.127 20.574,7.874
PGND on Bottom "Bottom-PGND" (solid, remove dead copper, pour order 148): 34.7,27.686 43.942,27.686 43.942,24.765 49.022,24.765 49.022,21.002 52,21.002 52,24.765 52.07,24.765 52.07,49.908 41.783,50.038 41.783,35.941 35.687,35.941 35.687,50.038 26.289,50.038 26.289,35.941 15.748,35.941 15.748,50 10.414,50 10.414,27.559 18.796,27.559 18.796,32.131 22.606,32.131 22.606,27.686 30.635,27.686 30.635,32.131 34.7,32.131
GND on Bottom "GND_L06_P058" (solid, remove dead copper, pour order 58): 52,20.447 52,17.018 49.006,17.018 49.006,20.447
DCBUS on Bottom "DCBUS_L06_P111" (solid, remove dead copper, pour order 111): 16.256,50.038 16.256,36.322 25.654,36.322 25.654,50.038
SH_C on Bottom "SH_C_L06_P123" (solid, remove dead copper, pour order 123): 32.893,26.86 32.893,16.891 43.307,16.891 43.307,26.86
SH_B on Bottom "SH_B_L06_P122" (solid, remove dead copper, pour order 122): 20.828,26.86 20.828,16.891 31.242,16.891 31.242,26.86
SH_A on Bottom "SH_A_L06_P121" (solid, remove dead copper, pour order 121): 8.636,26.797 8.636,16.891 19.05,16.891 19.05,26.797
DCBUS on Bottom "DCBUS_L06_P115" (solid, remove dead copper, pour order 115): 10.033,50.038 10.033,32.004 6.731,32.004 6.731,25.4 0,25.4 0,50.038
DCBUS on Bottom "DCBUS_L06_P106" (solid, remove dead copper, pour order 106): 36.195,50 36.195,36.322 41.275,36.322 41.275,50
AGND on Bottom "AGND_L06_P064" (solid, remove dead copper, pour order 64): 47.355,22.808 47.355,19.177 48.752,19.177 48.752,22.808
W on Signal2 "W_L04_P152" (solid, remove dead copper, pour order 152): 31.369,8.89 31.369,0.127 41.084,0.127 41.084,8.89
V on Signal2 "V_L04_P151" (solid, remove dead copper, pour order 151): 21.082,8.89 21.082,0.127 30.861,0.127 30.861,8.89
U on Signal2 "U_L04_P150" (solid, remove dead copper, pour order 150): 10.858,0.127 10.858,8.89 20.574,8.89 20.574,0.127
SH_C on Signal2 "SH_C_L04_P139" (solid, remove dead copper, pour order 139): 32.893,21.59 32.893,16.129 43.434,16.129 43.434,21.59
SH_B on Signal2 "SH_B_L04_P138" (solid, remove dead copper, pour order 138): 20.828,21.59 20.828,16.129 31.242,16.129 31.242,21.59
SH_A on Signal2 "SH_A_L04_P137" (solid, remove dead copper, pour order 137): 8.636,21.59 8.636,16.129 19.242,16.129 19.242,21.59
no net on Signal2 "NONET_L04_P134" (solid, remove dead copper, pour order 134): -0.762,50.863 -0.762,22.733 52.832,22.733 52.832,50.736
DCBUS on Signal2 "DCBUS_L04_P133" (solid, remove dead copper, pour order 133): -0.762,50.863 -0.762,22.733 52.832,22.733 52.832,50.736
PGND on Gnd1 "PGND_L03_P162" (solid, remove dead copper, pour order 162): -0.762,50.863 -0.762,24.638 52.832,24.638 52.832,50.736
SH_C on Gnd1 "SH_C_L03_P161" (solid, remove dead copper, pour order 161): 32.893,21.59 32.893,16.129 43.434,16.129 43.434,21.59
SH_B on Gnd1 "SH_B_L03_P160" (solid, remove dead copper, pour order 160): 20.828,21.59 20.828,16.129 31.242,16.129 31.242,21.59
SH_A on Gnd1 "SH_A_L03_P159" (solid, remove dead copper, pour order 159): 8.636,21.59 19.242,21.59 19.242,16.129 8.61,16.129
W on Gnd1 "W_L03_P158" (solid, remove dead copper, pour order 158): 31.369,8.89 31.369,0.127 41.084,0.127 41.084,8.89
V on Gnd1 "V_L03_P157" (solid, remove dead copper, pour order 157): 21.082,8.89 21.082,0.127 30.861,0.127 30.861,8.89
U on Gnd1 "U_L03_P156" (solid, remove dead copper, pour order 156): 10.858,8.89 10.858,0.127 20.574,0.127 20.574,8.89
AGND on Gnd1 "AGND_L03_P149" (solid, remove dead copper, pour order 149): 52,14.769 48.858,14.769 48.858,22.808 47.244,22.808 47.244,14.859 12.319,14.859 12.319,10.266 52,10.266
SH_C on Signal1 "SH_C_L02_P173" (solid, remove dead copper, pour order 173): 32.893,21.59 32.893,16.129 43.434,16.129 43.434,21.59
SH_B on Signal1 "SH_B_L02_P172" (solid, remove dead copper, pour order 172): 20.828,21.59 20.828,16.129 31.242,16.129 31.242,21.59
SH_A on Signal1 "SH_A_L02_P171" (solid, remove dead copper, pour order 171): 8.636,21.59 8.61,21.564 8.61,16.129 19.242,16.129 19.242,21.59
DCBUS on Signal1 "DCBUS_L02_P169" (solid, remove dead copper, pour order 169): -0.762,50.863 -0.762,22.733 52.832,22.733 52.832,50.736
W on Signal1 "W_L02_P165" (solid, remove dead copper, pour order 165): 31.369,8.89 31.369,0.127 41.084,0.127 41.084,8.89
V on Signal1 "V_L02_P164" (solid, remove dead copper, pour order 164): 21.082,8.89 21.082,0.127 30.861,0.127 30.861,8.89
U on Signal1 "U_L02_P163" (solid, remove dead copper, pour order 163): 10.858,8.89 10.858,0.127 20.574,0.127 20.574,8.89
SH_C on Gnd2 "SH_C_L05_P176" (solid, remove dead copper, pour order 176): 32.893,21.59 32.893,16.129 43.434,16.129 43.434,21.59
SH_B on Gnd2 "SH_B_L05_P175" (solid, remove dead copper, pour order 175): 20.828,21.59 20.828,16.129 31.242,16.129 31.242,21.59
SH_A on Gnd2 "SH_A_L05_P174" (solid, remove dead copper, pour order 174): 8.623,21.577 8.623,16.142 8.61,16.129 19.242,16.129 19.242,21.59
PGND on Gnd2 "PGND_L05_P170" (solid, remove dead copper, pour order 170): -0.762,50.863 -0.762,24.638 52.832,24.638 52.832,50.736
W on Gnd2 "W_L05_P168" (solid, remove dead copper, pour order 168): 31.369,8.89 31.369,0.127 41.084,0.127 41.084,8.89
V on Gnd2 "V_L05_P167" (solid, remove dead copper, pour order 167): 21.082,8.89 21.082,0.127 30.861,0.127 30.861,8.89
U on Gnd2 "U_L05_P166" (solid, remove dead copper, pour order 166): 10.858,8.89 10.858,0.127 20.574,0.127 20.574,8.89

## Silkscreen, mask and mechanical layers (free items; w line width, h text height)
Top Overlay:
  region: 14.619,47.447 15.635,47.447 15.635,46.363 14.619,46.363
  region: 14.646,49.043 15.662,49.043 15.662,47.955 14.646,47.955
  region: 16.387,49.059 17.403,49.059 17.403,47.971 16.387,47.971
  region: 16.341,47.422 17.357,47.422 17.357,46.337 16.341,46.337
  region: 34.544,47.443 37.338,47.443 37.338,46.355 34.544,46.355
  region: 34.544,49.094 37.338,49.094 37.338,48.006 34.544,48.006
  lines w0.305: 2.667,2.794 4.953,5.08 6.858,5.08
  lines w0.381: 14.478,46.177 17.526,46.177 17.526,49.225 14.478,49.225 14.478,46.177 ; 34.442,46.228 37.49,46.228 37.49,49.276 34.442,49.276 34.442,46.228
  text "Inline Current-Sense" at 45.868,44.805 h2.03 r270
  text "3S-6S" at 49.048,39.325 h2.54 r270
  text "M2" at 7.611,4.445 h2.03
Bottom Overlay:
  drawing of 18 lines, arcs and shapes, not listed
  text "6 Layer Ver" at 3.046,42.467 h2.03 r90
  text "BLAZER FOC" at 3.637,26.32 h3.81 r90
  text "2.2uF" at 48.654,23.201 h1.14
  text "Driver" at 6.827,19.989 h3.05 r90
  text "3.3k" at 48.199,18.175 h1.14
  text "NTC" at 45.674,18.174 h1.14
  text "0.1uF" at 18.292,15.254 h1.14
  text "0.1uF" at 28.452,15.254 h1.14
  text "0.1uF" at 38.612,15.254 h1.14
  text "V3.0" at 6.707,8.429 h2.03 r90
  text "U" at 16.396,5.873 h2.54
  text "V" at 26.92,5.842 h2.54
  text "W" at 37.262,5.842 h2.54
Top Solder:
  rectangle: 43.539,22.843 44.815,31.573
  rectangle: 31.437,22.733 32.713,31.611
  rectangle: 19.288,22.733 20.564,31.611
  rectangle: 6.969,22.733 8.245,31.611
Bottom Solder:
  rectangle: 30.226,36.957 32.258,44.704
  rectangle: 19.685,36.957 21.717,44.704
  rectangle: 10.387,33.274 41.529,34.798
Mechanical 1:
  the board outline again, w0.254